# EAGLE board GPS_Shield_Panel_v20 (EAGLE 7.5.0), part 1 of 3
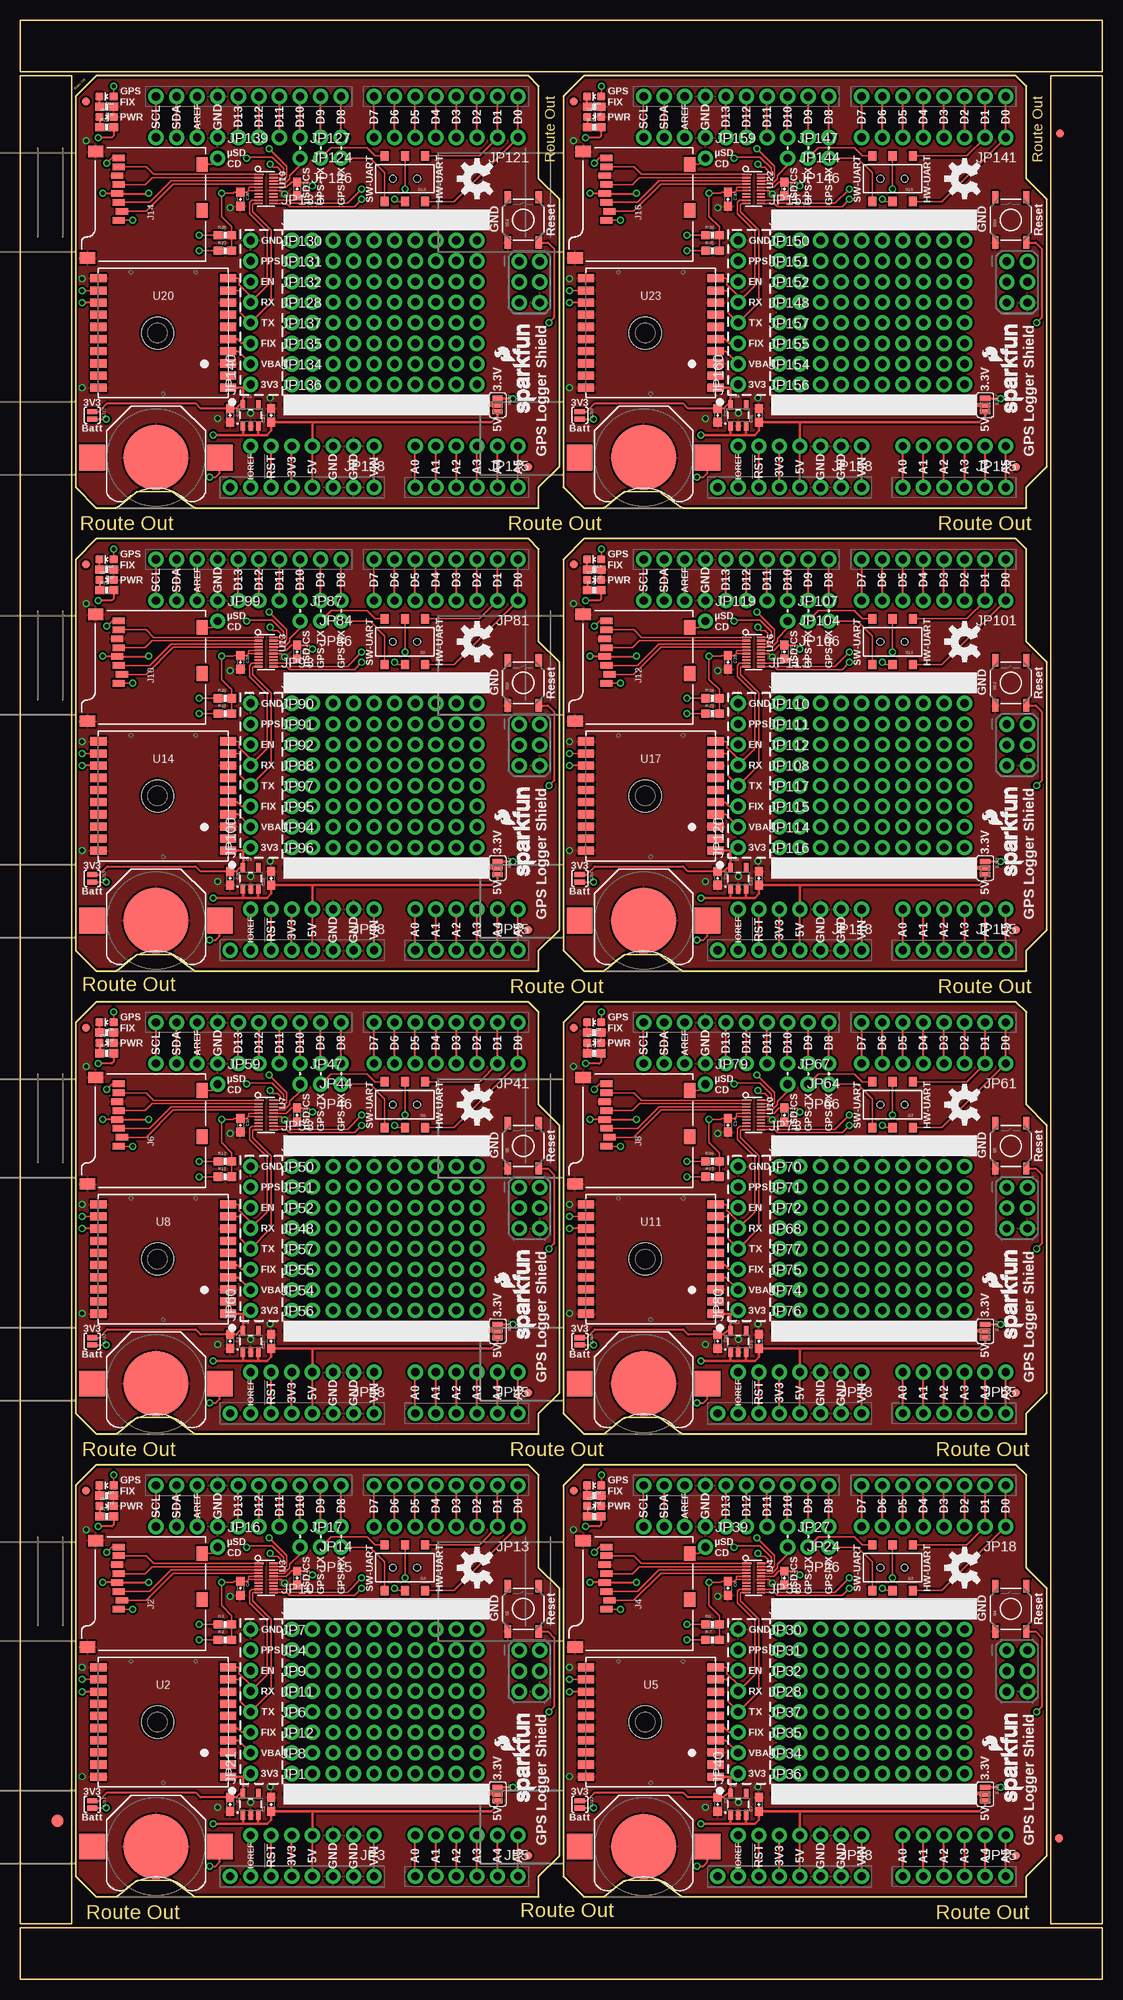
[diagram p0: board, top side]
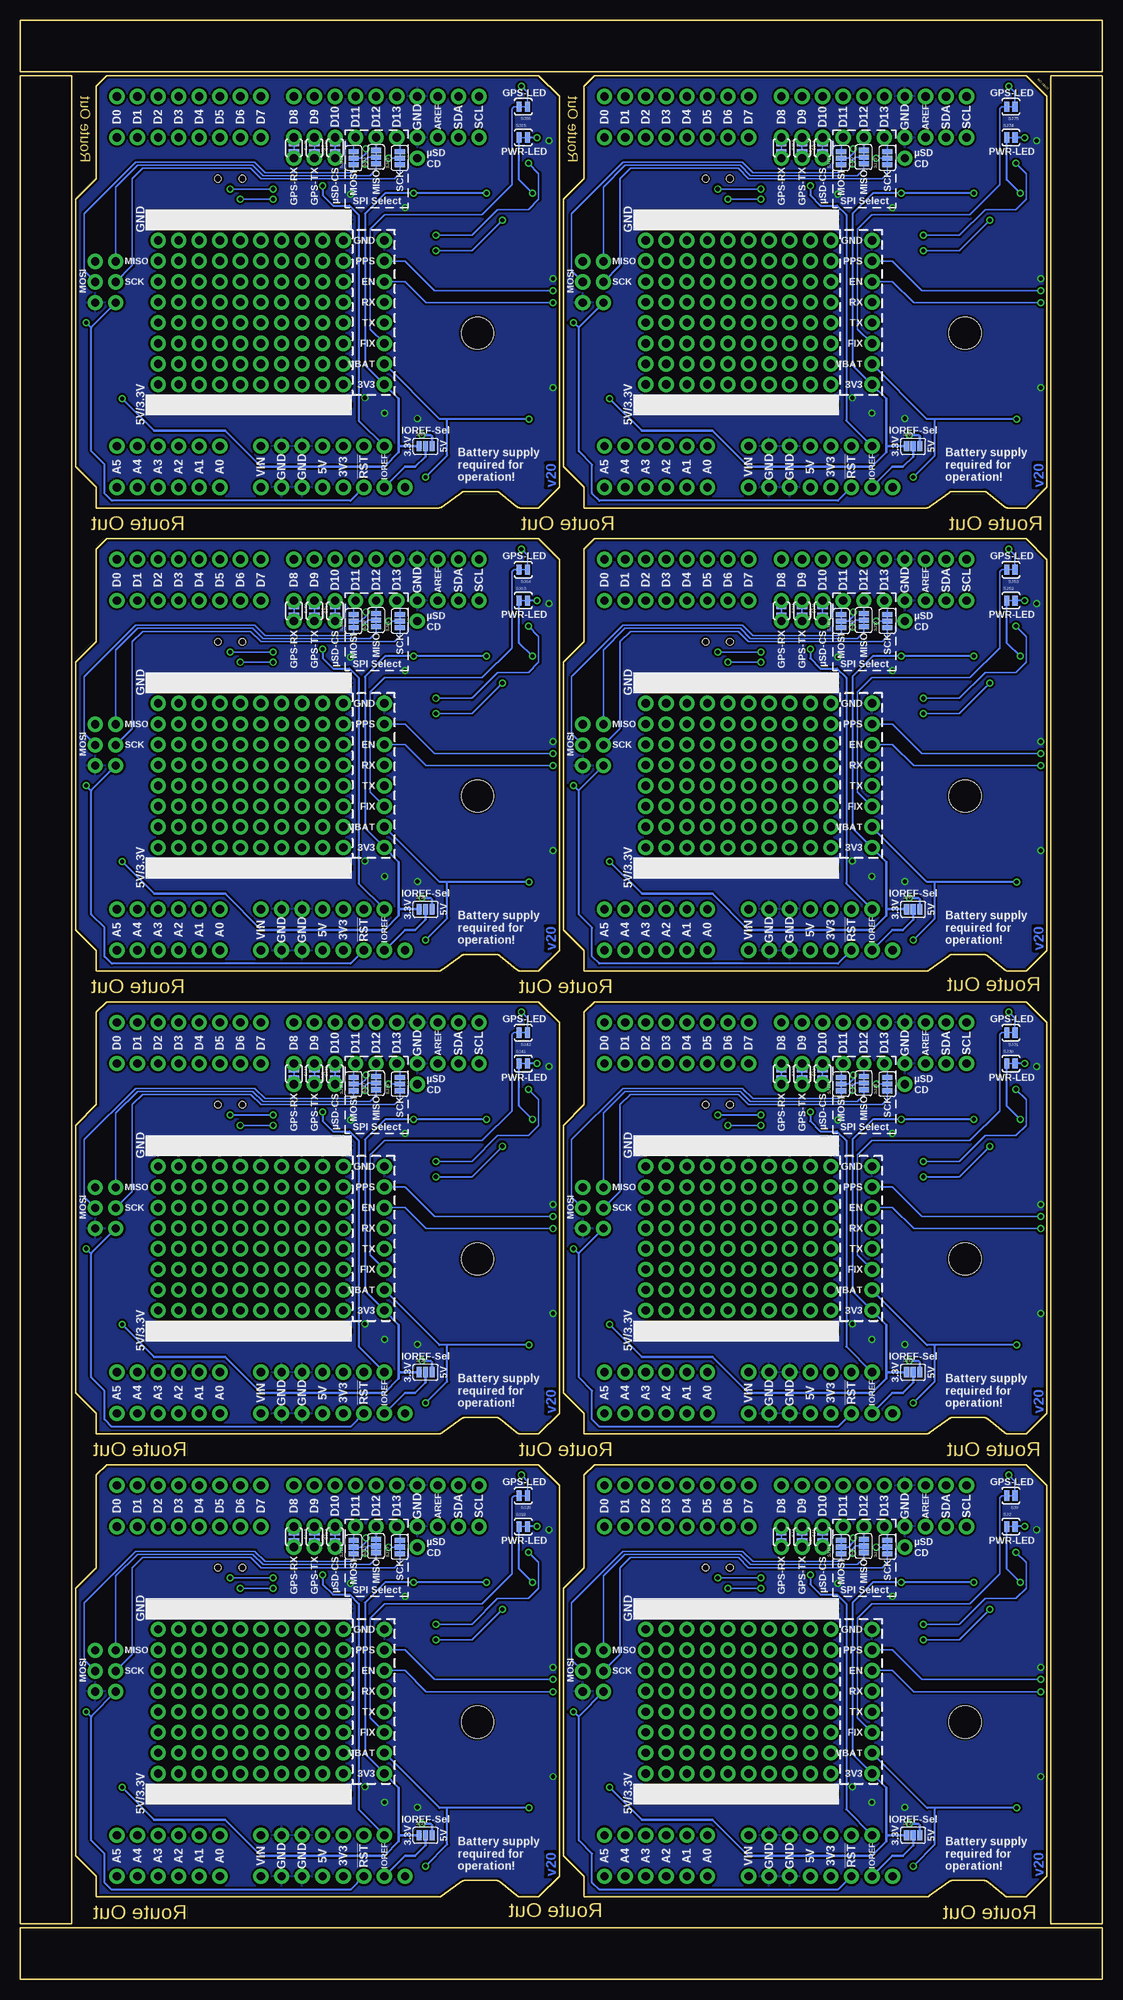
[diagram p1: board, bottom side, seen from below]

Size 133.6 x 241.81 mm. Coordinates in mm from the lower left corner, seen from the top.
Outline: 6.35,82.55 6.35,6.86 0,6.86 0,33.02
Outline: 0,30.48 0,234.95 6.35,234.95 6.35,80.01
Outline: 79.25,0 0,0 0,6.35 29.72,6.35
Outline: 27.18,6.35 133.6,6.35 133.6,0 76.71,0
Outline: 127.25,162.56 127.25,234.95 133.6,234.95 133.6,212.09
Outline: 133.6,214.63 133.6,6.86 127.25,6.86 127.25,165.1
Outline: 54.36,241.81 133.6,241.81 133.6,235.46 103.89,235.46
Outline: 106.43,235.46 0,235.46 0,241.81 56.9,241.81
Outline: 6.86,60.96 9.4,63.5 62.74,63.5 64.01,62.23 64.01,50.8 66.55,48.26 66.55,15.24 64.01,12.7 64.01,10.16 21.73,10.16 arc-45 21.28,10.35 18.98,12.01 arc45 18.53,12.19 14.61,12.19 arc45 14.16,12.01 12.12,10.35 arc-45 11.68,10.16 9.4,10.16 6.86,12.7 6.86,60.96
Outline: 67.06,60.96 69.6,63.5 122.94,63.5 124.21,62.23 124.21,50.8 126.75,48.26 126.75,15.24 124.21,12.7 124.21,10.16 81.92,10.16 arc-45 81.47,10.35 79.18,12.01 arc45 78.73,12.19 74.81,12.19 arc45 74.36,12.01 72.32,10.35 arc-45 71.87,10.16 69.6,10.16 67.06,12.7 67.06,60.96
Outline: 6.86,118.11 9.4,120.65 62.74,120.65 64.01,119.38 64.01,107.95 66.55,105.41 66.55,72.39 64.01,69.85 64.01,67.31 21.73,67.31 arc-45 21.28,67.5 18.98,69.16 arc45 18.53,69.34 14.61,69.34 arc45 14.16,69.16 12.12,67.5 arc-45 11.68,67.31 9.4,67.31 6.86,69.85 6.86,118.11
Outline: 67.06,118.11 69.6,120.65 122.94,120.65 124.21,119.38 124.21,107.95 126.75,105.41 126.75,72.39 124.21,69.85 124.21,67.31 81.92,67.31 arc-45 81.47,67.5 79.18,69.16 arc45 78.73,69.34 74.81,69.34 arc45 74.36,69.16 72.32,67.5 arc-45 71.87,67.31 69.6,67.31 67.06,69.85 67.06,118.11
Outline: 6.86,175.26 9.4,177.8 62.74,177.8 64.01,176.53 64.01,165.1 66.55,162.56 66.55,129.54 64.01,127 64.01,124.46 21.73,124.46 arc-45 21.28,124.65 18.98,126.31 arc45 18.53,126.49 14.61,126.49 arc45 14.16,126.31 12.12,124.65 arc-45 11.68,124.46 9.4,124.46 6.86,127 6.86,175.26
Outline: 67.06,175.26 69.6,177.8 122.94,177.8 124.21,176.53 124.21,165.1 126.75,162.56 126.75,129.54 124.21,127 124.21,124.46 81.92,124.46 arc-45 81.47,124.65 79.18,126.31 arc45 78.73,126.49 74.81,126.49 arc45 74.36,126.31 72.32,124.65 arc-45 71.87,124.46 69.6,124.46 67.06,127 67.06,175.26
Outline: 6.86,232.41 9.4,234.95 62.74,234.95 64.01,233.68 64.01,222.25 66.55,219.71 66.55,186.69 64.01,184.15 64.01,181.61 21.73,181.61 arc-45 21.28,181.8 18.98,183.46 arc45 18.53,183.64 14.61,183.64 arc45 14.16,183.46 12.12,181.8 arc-45 11.68,181.61 9.4,181.61 6.86,184.15 6.86,232.41
Outline: 67.06,232.41 69.6,234.95 122.94,234.95 124.21,233.68 124.21,222.25 126.75,219.71 126.75,186.69 124.21,184.15 124.21,181.61 81.92,181.61 arc-45 81.47,181.8 79.18,183.46 arc45 78.73,183.64 74.81,183.64 arc45 74.36,183.46 72.32,181.8 arc-45 71.87,181.61 69.6,181.61 67.06,184.15 67.06,232.41
Copper layers (1*16): Top 0.035mm / dielectric 1.5mm / Bottom 0.035mm
Design rules "SparkFun-2-layer-TIGHT": minimum track width 7mil, minimum drill 15mil, track to track 7mil, track to pad 7mil, pad to pad 7mil, via to via 7mil, smd to smd 7mil, copper to edge 7mil, drill to drill 7mil, minimum pad ring 7mil, minimum via ring 7mil, stop-mask expansion 4mil, vias tented up to drill 20mil, thermal gap 10mil

## Footprints (pad centres in the part's own frame; a part is rotated, then mirrored left to right if it is on the bottom)
BATTCON_12MM = smd 8 x 8: GND 0,0 | smd 3.175 x 3.175: PWR@1 -7.874,0; PWR@2 7.874,0
0603-CAP = smd 1.1 x 1: 1 -0.85,0; 2 0.85,0
LED-0603 = smd 1 x 1: A 0,-0.877; C 0,0.877
FIDUCIAL-1.5X3 = smd 1.5 x 1.5: 1 0,0
FIDUCIAL-1X2 = smd 1 x 1: 1 0,0
UNO_R3_SHIELD_ICSP_NOLABELS = drill 1.016 pad 1.88: 3.3V 50.8,26.67; 5V 50.8,29.21; 5V_ICSP 22.91,57.29; A0 50.8,41.91; A1 50.8,44.45; A2 50.8,46.99; A3 50.8,49.53; A4 50.8,52.07; A5 50.8,54.61; AREF 2.54,14.986; D2 2.54,49.53; D3 2.54,46.99; D4 2.54,44.45; D5 2.54,41.91; D6 2.54,39.37; D7 2.54,36.83; D8 2.54,32.766; D9 2.54,30.226; D10 2.54,27.686; D11 2.54,25.146; D12 2.54,22.606; D13 2.54,20.066; GND@0 50.8,31.75; GND@1 50.8,34.29; GND@2 2.54,17.526; GND_ICSP 27.99,57.29; IOREF 50.8,21.59; MISO 22.91,54.75; MOSI 25.45,57.29; NC 50.8,19.05; RES 50.8,24.13; RST_ICSP 27.99,54.75; RX 2.54,54.61; SCK 25.45,54.75; SCL 2.54,9.906; SDA 2.54,12.446; TX 2.54,52.07; VIN 50.8,36.83
MICRO-SD-SOCKET-PP = smd 1.8 x 1.4: CD1 -2.05,0.4; CD2 -7.75,0.4 | smd 0.8 x 1.5: CS -7.84,10.3; DI -6.74,10.7; DO -2.34,10.7; GND -3.44,10.9; RSV1 -8.94,10.7; RSV2 -1.24,10.7; SCLK -4.54,10.7; VCC -5.64,10.9 | smd 1.4 x 1.9: GND1 -13.6,14.55; GND3 -0.45,13.55
1X10_NO_SILK = drill 1.016 pad 1.88: 1 0,0; 2 2.54,0; 3 5.08,0; 4 7.62,0; 5 10.16,0; 6 12.7,0; 7 15.24,0; 8 17.78,0; 9 20.32,0; 10 22.86,0
1X07_NO_SILK = drill 1.016 pad 1.88: 1 0,0; 2 2.54,0; 3 5.08,0; 4 7.62,0; 5 10.16,0; 6 12.7,0; 7 15.24,0
1X06_NO_SILK = drill 1.016 pad 1.88: 1 0,0; 2 2.54,0; 3 5.08,0; 4 7.62,0; 5 10.16,0; 6 12.7,0
1X08_NO_SILK = drill 1.016 pad 1.88: 1 0,0; 2 2.54,0; 3 5.08,0; 4 7.62,0; 5 10.16,0; 6 12.7,0; 7 15.24,0; 8 17.78,0
1X02_NO_SILK = drill 1.016 pad 1.88: 1 0,0; 2 2.54,0
1X01_NO_SILK = drill 1.016 pad 1.88: 1 0,0
0603-RES = smd 1.1 x 1: 1 -0.85,0; 2 0.85,0
TACTILE-SWITCH-SMD = smd 1.524 x 0.762: 1 -2.794,1.905; 2 2.794,1.905; 3 -2.794,-1.905; 4 2.794,-1.905
AYZ0202 = smd 1 x 1.15: 1 -2.5,2.825; 2 0,2.825; 3 2.5,2.825; 4 -2.5,-2.825; 5 0,-2.825; 6 2.5,-2.825 | hole 0.85: 1.5,0; -1.5,0
PAD-JUMPER-3-2OF3_NC_BY_PASTE_YES_SILK_FULL_BOX = smd 0.635 x 1.27: 1 -0.813,0; 2 0,0; 3 0.813,0
PAD-JUMPER-2-NC_BY_TRACE_YES_SILK = smd 0.635 x 1.27: 1 -0.508,0; 2 0.508,0
PAD-JUMPER-3-NO_YES_SILK = smd 0.635 x 1.27: 1 -0.813,0; 2 0,0; 3 0.813,0
PAD-JUMPER-3-3OF3_NC_BY_TRACE_YES_SILK_FULL_BOX = smd 0.635 x 1.27: 1 -0.813,0; 2 0,0; 3 0.813,0
PAD-JUMPER-2-NO_YES_SILK = smd 0.635 x 1.27: 1 -0.45,0; 2 0.45,0
SOT23-5 = smd 0.55 x 1.2: 1 -0.95,-1.3; 2 0,-1.3; 3 0.95,-1.3; 4 0.95,1.3; 5 -0.95,1.3
GP3906-TLP = smd 2 x 1: 1 8,-6.75; 2 8,-5.25; 3 8,-3.75; 4 8,-2.25; 5 8,-0.75; 6 8,0.75; 7 8,2.25; 8 8,3.75; 9 8,5.25; 10 8,6.75; 11 -8,6.75; 12 -8,5.25; 13 -8,3.75; 14 -8,2.25; 15 -8,0.75; 16 -8,-0.75; 17 -8,-2.25; 18 -8,-3.75; 19 -8,-5.25; 20 -8,-6.75 | hole 4: -0.7,0
UFDFN-20 = smd 0.2 x 1.1: 1 -1.8,-0.85 | smd 0.2 x 1: 2 -1.4,-0.9; 3 -1,-0.9; 4 -0.6,-0.9; 5 -0.2,-0.9; 6 0.2,-0.9; 7 0.6,-0.9; 8 1,-0.9; 9 1.4,-0.9; 10 1.8,-0.9; 11 1.8,0.9; 12 1.4,0.9; 13 1,0.9; 14 0.6,0.9; 15 0.2,0.9; 16 -0.2,0.9; 17 -0.6,0.9; 18 -1,0.9; 19 -1.4,0.9; 20 -1.8,0.9

## Placement (x,y rotation side)
BAT1  12mm  [BATTCON_12MM]  16.76,16.38 180 top
BAT2  12mm  [BATTCON_12MM]  76.96,16.38 180 top
BAT3  12mm  [BATTCON_12MM]  16.76,73.53 180 top
BAT4  12mm  [BATTCON_12MM]  76.96,73.53 180 top
BAT5  12mm  [BATTCON_12MM]  16.76,130.68 180 top
BAT6  12mm  [BATTCON_12MM]  76.96,130.68 180 top
BAT7  12mm  [BATTCON_12MM]  16.76,187.83 180 top
BAT8  12mm  [BATTCON_12MM]  76.96,187.83 180 top
C1  1.0uF  [0603-CAP]  30.99,21.59 90 top
C2  1.0uF  [0603-CAP]  25.91,21.59 270 top
C3  0.1uF  [0603-CAP]  34.16,49.53 270 top
C4  0.1uF  [0603-CAP]  27.18,48.26 270 top
C5  0.1uF  [0603-CAP]  94.36,49.53 270 top
C6  0.1uF  [0603-CAP]  87.38,48.26 270 top
C7  1.0uF  [0603-CAP]  91.19,21.59 90 top
C8  1.0uF  [0603-CAP]  86.11,21.59 270 top
C9  0.1uF  [0603-CAP]  34.16,106.68 270 top
C10  0.1uF  [0603-CAP]  27.18,105.41 270 top
C11  1.0uF  [0603-CAP]  30.99,78.74 90 top
C12  1.0uF  [0603-CAP]  25.91,78.74 270 top
C13  0.1uF  [0603-CAP]  94.36,106.68 270 top
C14  0.1uF  [0603-CAP]  87.38,105.41 270 top
C15  1.0uF  [0603-CAP]  91.19,78.74 90 top
C16  1.0uF  [0603-CAP]  86.11,78.74 270 top
C17  0.1uF  [0603-CAP]  34.16,163.83 270 top
C18  0.1uF  [0603-CAP]  27.18,162.56 270 top
C19  1.0uF  [0603-CAP]  30.99,135.89 90 top
C20  1.0uF  [0603-CAP]  25.91,135.89 270 top
C21  0.1uF  [0603-CAP]  94.36,163.83 270 top
C22  0.1uF  [0603-CAP]  87.38,162.56 270 top
C23  1.0uF  [0603-CAP]  91.19,135.89 90 top
C24  1.0uF  [0603-CAP]  86.11,135.89 270 top
C25  0.1uF  [0603-CAP]  34.16,220.98 270 top
C26  0.1uF  [0603-CAP]  27.18,219.71 270 top
C27  1.0uF  [0603-CAP]  30.99,193.04 90 top
C28  1.0uF  [0603-CAP]  25.91,193.04 270 top
C29  0.1uF  [0603-CAP]  94.36,220.98 270 top
C30  0.1uF  [0603-CAP]  87.38,219.71 270 top
C31  1.0uF  [0603-CAP]  91.19,193.04 90 top
C32  1.0uF  [0603-CAP]  86.11,193.04 270 top
D1  RED  [LED-0603]  10.67,58.42 270 top
D2  BLUE  [LED-0603]  10.67,60.96 90 top
D3  RED  [LED-0603]  70.87,58.42 270 top
D4  BLUE  [LED-0603]  70.87,60.96 90 top
D5  RED  [LED-0603]  10.67,115.57 270 top
D6  BLUE  [LED-0603]  10.67,118.11 90 top
D7  RED  [LED-0603]  70.87,115.57 270 top
D8  BLUE  [LED-0603]  70.87,118.11 90 top
D9  RED  [LED-0603]  10.67,172.72 270 top
D10  BLUE  [LED-0603]  10.67,175.26 90 top
D11  RED  [LED-0603]  70.87,172.72 270 top
D12  BLUE  [LED-0603]  70.87,175.26 90 top
D13  RED  [LED-0603]  10.67,229.87 270 top
D14  BLUE  [LED-0603]  10.67,232.41 90 top
D15  RED  [LED-0603]  70.87,229.87 270 top
D16  BLUE  [LED-0603]  70.87,232.41 90 top
E$1  [FIDUCIAL-1.5X3]  4.57,19.56 0 top
E$4  [FIDUCIAL-1X2]  128.27,17.4 90 top
E$5  [FIDUCIAL-1X2]  128.4,227.84 180 top
J1  ARDUINO_R3_SHIELD  [UNO_R3_SHIELD_ICSP_NOLABELS]  6.86,63.5 270 top
J2  USD_CONNECTOR  [MICRO-SD-SOCKET-PP]  22.86,54.61 90 top
J3  ARDUINO_R3_SHIELD  [UNO_R3_SHIELD_ICSP_NOLABELS]  67.06,63.5 270 top
J4  USD_CONNECTOR  [MICRO-SD-SOCKET-PP]  83.06,54.61 90 top
J5  ARDUINO_R3_SHIELD  [UNO_R3_SHIELD_ICSP_NOLABELS]  6.86,120.65 270 top
J6  USD_CONNECTOR  [MICRO-SD-SOCKET-PP]  22.86,111.76 90 top
J7  ARDUINO_R3_SHIELD  [UNO_R3_SHIELD_ICSP_NOLABELS]  67.06,120.65 270 top
J8  USD_CONNECTOR  [MICRO-SD-SOCKET-PP]  83.06,111.76 90 top
J9  ARDUINO_R3_SHIELD  [UNO_R3_SHIELD_ICSP_NOLABELS]  6.86,177.8 270 top
J10  USD_CONNECTOR  [MICRO-SD-SOCKET-PP]  22.86,168.91 90 top
J11  ARDUINO_R3_SHIELD  [UNO_R3_SHIELD_ICSP_NOLABELS]  67.06,177.8 270 top
J12  USD_CONNECTOR  [MICRO-SD-SOCKET-PP]  83.06,168.91 90 top
J13  ARDUINO_R3_SHIELD  [UNO_R3_SHIELD_ICSP_NOLABELS]  6.86,234.95 270 top
J14  USD_CONNECTOR  [MICRO-SD-SOCKET-PP]  22.86,226.06 90 top
J15  ARDUINO_R3_SHIELD  [UNO_R3_SHIELD_ICSP_NOLABELS]  67.06,234.95 270 top
J16  USD_CONNECTOR  [MICRO-SD-SOCKET-PP]  83.06,226.06 90 top
JP1  [1X10_NO_SILK]  33.53,22.86 0 top
JP2  [1X10_NO_SILK]  33.53,43.18 0 top
JP3  [1X07_NO_SILK]  43.69,17.78 180 top
JP4  [1X10_NO_SILK]  33.53,38.1 0 top
JP5  [1X06_NO_SILK]  61.47,17.78 180 top
JP6  [1X10_NO_SILK]  33.53,30.48 0 top
JP7  [1X10_NO_SILK]  33.53,40.64 0 top
JP8  [1X10_NO_SILK]  33.53,25.4 0 top
JP9  [1X10_NO_SILK]  33.53,35.56 0 top
JP10  [1X10_NO_SILK]  33.53,45.72 0 top
JP11  [1X10_NO_SILK]  33.53,33.02 0 top
JP12  [1X10_NO_SILK]  33.53,27.94 0 top
JP13  [1X08_NO_SILK]  61.47,55.88 180 top
JP14  [1X10_NO_SILK]  39.62,55.88 180 top
JP15  [1X02_NO_SILK]  39.62,53.34 180 top
JP16  [1X01_NO_SILK]  24.38,53.34 0 top
JP17  [1X01_NO_SILK]  34.54,53.34 0 top
JP18  [1X08_NO_SILK]  121.67,55.88 180 top
JP19  FIDUCIAL1X2  [FIDUCIAL-1X2]  8.13,60.33 270 top
JP20  FIDUCIAL1X2  [FIDUCIAL-1X2]  62.74,15.24 270 top
JP21  [1X08_NO_SILK]  28.45,25.4 90 top
JP22  FIDUCIAL1X2  [FIDUCIAL-1X2]  122.94,15.24 270 top
JP23  FIDUCIAL1X2  [FIDUCIAL-1X2]  68.33,60.33 270 top
JP24  [1X10_NO_SILK]  99.82,55.88 180 top
JP25  [1X06_NO_SILK]  121.67,17.78 180 top
JP26  [1X02_NO_SILK]  99.82,53.34 180 top
JP27  [1X01_NO_SILK]  94.74,53.34 0 top
JP28  [1X10_NO_SILK]  93.73,33.02 0 top
JP29  [1X10_NO_SILK]  93.73,43.18 0 top
JP30  [1X10_NO_SILK]  93.73,40.64 0 top
JP31  [1X10_NO_SILK]  93.73,38.1 0 top
JP32  [1X10_NO_SILK]  93.73,35.56 0 top
JP33  [1X10_NO_SILK]  93.73,45.72 0 top
JP34  [1X10_NO_SILK]  93.73,25.4 0 top
JP35  [1X10_NO_SILK]  93.73,27.94 0 top
JP36  [1X10_NO_SILK]  93.73,22.86 0 top
JP37  [1X10_NO_SILK]  93.73,30.48 0 top
JP38  [1X07_NO_SILK]  103.89,17.78 180 top
JP39  [1X01_NO_SILK]  84.58,53.34 0 top
JP40  [1X08_NO_SILK]  88.65,25.4 90 top
JP41  [1X08_NO_SILK]  61.47,113.03 180 top
JP42  FIDUCIAL1X2  [FIDUCIAL-1X2]  62.74,72.39 270 top
JP43  FIDUCIAL1X2  [FIDUCIAL-1X2]  8.13,117.47 270 top
JP44  [1X10_NO_SILK]  39.62,113.03 180 top
JP45  [1X06_NO_SILK]  61.47,74.93 180 top
JP46  [1X02_NO_SILK]  39.62,110.49 180 top
JP47  [1X01_NO_SILK]  34.54,110.49 0 top
JP48  [1X10_NO_SILK]  33.53,90.17 0 top
JP49  [1X10_NO_SILK]  33.53,100.33 0 top
JP50  [1X10_NO_SILK]  33.53,97.79 0 top
JP51  [1X10_NO_SILK]  33.53,95.25 0 top
JP52  [1X10_NO_SILK]  33.53,92.71 0 top
JP53  [1X10_NO_SILK]  33.53,102.87 0 top
JP54  [1X10_NO_SILK]  33.53,82.55 0 top
JP55  [1X10_NO_SILK]  33.53,85.09 0 top
JP56  [1X10_NO_SILK]  33.53,80.01 0 top
JP57  [1X10_NO_SILK]  33.53,87.63 0 top
JP58  [1X07_NO_SILK]  43.69,74.93 180 top
JP59  [1X01_NO_SILK]  24.38,110.49 0 top
JP60  [1X08_NO_SILK]  28.45,82.55 90 top
JP61  [1X08_NO_SILK]  121.67,113.03 180 top
JP62  FIDUCIAL1X2  [FIDUCIAL-1X2]  122.94,72.39 270 top
JP63  FIDUCIAL1X2  [FIDUCIAL-1X2]  68.33,117.47 270 top
JP64  [1X10_NO_SILK]  99.82,113.03 180 top
JP65  [1X06_NO_SILK]  121.67,74.93 180 top
JP66  [1X02_NO_SILK]  99.82,110.49 180 top
JP67  [1X01_NO_SILK]  94.74,110.49 0 top
JP68  [1X10_NO_SILK]  93.73,90.17 0 top
JP69  [1X10_NO_SILK]  93.73,100.33 0 top
JP70  [1X10_NO_SILK]  93.73,97.79 0 top
JP71  [1X10_NO_SILK]  93.73,95.25 0 top
JP72  [1X10_NO_SILK]  93.73,92.71 0 top
JP73  [1X10_NO_SILK]  93.73,102.87 0 top
JP74  [1X10_NO_SILK]  93.73,82.55 0 top
JP75  [1X10_NO_SILK]  93.73,85.09 0 top
JP76  [1X10_NO_SILK]  93.73,80.01 0 top
JP77  [1X10_NO_SILK]  93.73,87.63 0 top
JP78  [1X07_NO_SILK]  103.89,74.93 180 top
JP79  [1X01_NO_SILK]  84.58,110.49 0 top
JP80  [1X08_NO_SILK]  88.65,82.55 90 top
JP81  [1X08_NO_SILK]  61.47,170.18 180 top
JP82  FIDUCIAL1X2  [FIDUCIAL-1X2]  62.74,129.54 270 top
JP83  FIDUCIAL1X2  [FIDUCIAL-1X2]  8.13,174.62 270 top
JP84  [1X10_NO_SILK]  39.62,170.18 180 top
JP85  [1X06_NO_SILK]  61.47,132.08 180 top
JP86  [1X02_NO_SILK]  39.62,167.64 180 top
JP87  [1X01_NO_SILK]  34.54,167.64 0 top
JP88  [1X10_NO_SILK]  33.53,147.32 0 top
JP89  [1X10_NO_SILK]  33.53,157.48 0 top
JP90  [1X10_NO_SILK]  33.53,154.94 0 top
JP91  [1X10_NO_SILK]  33.53,152.4 0 top
JP92  [1X10_NO_SILK]  33.53,149.86 0 top
JP93  [1X10_NO_SILK]  33.53,160.02 0 top
JP94  [1X10_NO_SILK]  33.53,139.7 0 top
JP95  [1X10_NO_SILK]  33.53,142.24 0 top
JP96  [1X10_NO_SILK]  33.53,137.16 0 top
JP97  [1X10_NO_SILK]  33.53,144.78 0 top
JP98  [1X07_NO_SILK]  43.69,132.08 180 top
JP99  [1X01_NO_SILK]  24.38,167.64 0 top
JP100  [1X08_NO_SILK]  28.45,139.7 90 top
JP101  [1X08_NO_SILK]  121.67,170.18 180 top
JP102  FIDUCIAL1X2  [FIDUCIAL-1X2]  122.94,129.54 270 top
JP103  FIDUCIAL1X2  [FIDUCIAL-1X2]  68.33,174.62 270 top
JP104  [1X10_NO_SILK]  99.82,170.18 180 top
JP105  [1X06_NO_SILK]  121.67,132.08 180 top
JP106  [1X02_NO_SILK]  99.82,167.64 180 top
JP107  [1X01_NO_SILK]  94.74,167.64 0 top
JP108  [1X10_NO_SILK]  93.73,147.32 0 top
JP109  [1X10_NO_SILK]  93.73,157.48 0 top
JP110  [1X10_NO_SILK]  93.73,154.94 0 top
JP111  [1X10_NO_SILK]  93.73,152.4 0 top
JP112  [1X10_NO_SILK]  93.73,149.86 0 top
JP113  [1X10_NO_SILK]  93.73,160.02 0 top
JP114  [1X10_NO_SILK]  93.73,139.7 0 top
JP115  [1X10_NO_SILK]  93.73,142.24 0 top
JP116  [1X10_NO_SILK]  93.73,137.16 0 top
JP117  [1X10_NO_SILK]  93.73,144.78 0 top
JP118  [1X07_NO_SILK]  103.89,132.08 180 top
JP119  [1X01_NO_SILK]  84.58,167.64 0 top
JP120  [1X08_NO_SILK]  88.65,139.7 90 top
JP121  [1X08_NO_SILK]  61.47,227.33 180 top
JP122  FIDUCIAL1X2  [FIDUCIAL-1X2]  62.74,186.69 270 top
JP123  FIDUCIAL1X2  [FIDUCIAL-1X2]  8.13,231.78 270 top
JP124  [1X10_NO_SILK]  39.62,227.33 180 top
JP125  [1X06_NO_SILK]  61.47,189.23 180 top
JP126  [1X02_NO_SILK]  39.62,224.79 180 top
JP127  [1X01_NO_SILK]  34.54,224.79 0 top
JP128  [1X10_NO_SILK]  33.53,204.47 0 top
JP129  [1X10_NO_SILK]  33.53,214.63 0 top
JP130  [1X10_NO_SILK]  33.53,212.09 0 top
JP131  [1X10_NO_SILK]  33.53,209.55 0 top
JP132  [1X10_NO_SILK]  33.53,207.01 0 top
JP133  [1X10_NO_SILK]  33.53,217.17 0 top
JP134  [1X10_NO_SILK]  33.53,196.85 0 top
JP135  [1X10_NO_SILK]  33.53,199.39 0 top
JP136  [1X10_NO_SILK]  33.53,194.31 0 top
JP137  [1X10_NO_SILK]  33.53,201.93 0 top
JP138  [1X07_NO_SILK]  43.69,189.23 180 top
JP139  [1X01_NO_SILK]  24.38,224.79 0 top
JP140  [1X08_NO_SILK]  28.45,196.85 90 top
JP141  [1X08_NO_SILK]  121.67,227.33 180 top
JP142  FIDUCIAL1X2  [FIDUCIAL-1X2]  122.94,186.69 270 top
JP143  FIDUCIAL1X2  [FIDUCIAL-1X2]  68.33,231.78 270 top
JP144  [1X10_NO_SILK]  99.82,227.33 180 top
JP145  [1X06_NO_SILK]  121.67,189.23 180 top
JP146  [1X02_NO_SILK]  99.82,224.79 180 top
JP147  [1X01_NO_SILK]  94.74,224.79 0 top
JP148  [1X10_NO_SILK]  93.73,204.47 0 top
JP149  [1X10_NO_SILK]  93.73,214.63 0 top
JP150  [1X10_NO_SILK]  93.73,212.09 0 top
JP151  [1X10_NO_SILK]  93.73,209.55 0 top
JP152  [1X10_NO_SILK]  93.73,207.01 0 top
JP153  [1X10_NO_SILK]  93.73,217.17 0 top
JP154  [1X10_NO_SILK]  93.73,196.85 0 top
JP155  [1X10_NO_SILK]  93.73,199.39 0 top
JP156  [1X10_NO_SILK]  93.73,194.31 0 top
JP157  [1X10_NO_SILK]  93.73,201.93 0 top
JP158  [1X07_NO_SILK]  103.89,189.23 180 top
JP159  [1X01_NO_SILK]  84.58,224.79 0 top
JP160  [1X08_NO_SILK]  88.65,196.85 90 top
LOGO1  OSHW-LOGOM  [OSHW-LOGO-M]  56.39,50.8 90 top
LOGO2  SFE_LOGO_NAME_FLAME.1_INCH  [SFE_LOGO_NAME_FLAME_.1]  63.75,21.46 90 top
LOGO3  SFE_LOGO_NAME_FLAME.1_INCH  [SFE_LOGO_NAME_FLAME_.1]  123.95,21.46 90 top
LOGO4  OSHW-LOGOM  [OSHW-LOGO-M]  116.59,50.8 90 top
LOGO5  SFE_LOGO_NAME_FLAME.1_INCH  [SFE_LOGO_NAME_FLAME_.1]  63.75,78.61 90 top
LOGO6  OSHW-LOGOM  [OSHW-LOGO-M]  56.39,107.95 90 top
LOGO7  SFE_LOGO_NAME_FLAME.1_INCH  [SFE_LOGO_NAME_FLAME_.1]  123.95,78.61 90 top
LOGO8  OSHW-LOGOM  [OSHW-LOGO-M]  116.59,107.95 90 top
LOGO9  SFE_LOGO_NAME_FLAME.1_INCH  [SFE_LOGO_NAME_FLAME_.1]  63.75,135.76 90 top
LOGO10  OSHW-LOGOM  [OSHW-LOGO-M]  56.39,165.1 90 top
LOGO11  SFE_LOGO_NAME_FLAME.1_INCH  [SFE_LOGO_NAME_FLAME_.1]  123.95,135.76 90 top
LOGO12  OSHW-LOGOM  [OSHW-LOGO-M]  116.59,165.1 90 top
LOGO13  SFE_LOGO_NAME_FLAME.1_INCH  [SFE_LOGO_NAME_FLAME_.1]  63.75,192.91 90 top
LOGO14  OSHW-LOGOM  [OSHW-LOGO-M]  56.39,222.25 90 top
LOGO15  SFE_LOGO_NAME_FLAME.1_INCH  [SFE_LOGO_NAME_FLAME_.1]  123.95,192.91 90 top
LOGO16  OSHW-LOGOM  [OSHW-LOGO-M]  116.59,222.25 90 top
R1  1K  [0603-RES]  10.67,57.15 0 top
R2  100k  [0603-RES]  25.27,41.91 0 top
R3  100k  [0603-RES]  25.27,43.81 0 top
R4  330  [0603-RES]  10.67,59.69 180 top
R5  1K  [0603-RES]  70.87,57.15 0 top
R6  330  [0603-RES]  70.87,59.69 180 top
R7  100k  [0603-RES]  85.47,41.91 0 top
R8  100k  [0603-RES]  85.47,43.81 0 top
R9  1K  [0603-RES]  10.67,114.3 0 top
R10  330  [0603-RES]  10.67,116.84 180 top
R11  100k  [0603-RES]  25.27,99.06 0 top
R12  100k  [0603-RES]  25.27,100.97 0 top
R13  1K  [0603-RES]  70.87,114.3 0 top
R14  330  [0603-RES]  70.87,116.84 180 top
R15  100k  [0603-RES]  85.47,99.06 0 top
R16  100k  [0603-RES]  85.47,100.97 0 top
R17  1K  [0603-RES]  10.67,171.45 0 top
R18  330  [0603-RES]  10.67,173.99 180 top
R19  100k  [0603-RES]  25.27,156.21 0 top
R20  100k  [0603-RES]  25.27,158.12 0 top
R21  1K  [0603-RES]  70.87,171.45 0 top
R22  330  [0603-RES]  70.87,173.99 180 top
R23  100k  [0603-RES]  85.47,156.21 0 top
R24  100k  [0603-RES]  85.47,158.12 0 top
R25  1K  [0603-RES]  10.67,228.6 0 top
R26  330  [0603-RES]  10.67,231.14 180 top
R27  100k  [0603-RES]  25.27,213.36 0 top
R28  100k  [0603-RES]  25.27,215.26 0 top
R29  1K  [0603-RES]  70.87,228.6 0 top
R30  330  [0603-RES]  70.87,231.14 180 top
R31  100k  [0603-RES]  85.47,213.36 0 top
R32  100k  [0603-RES]  85.47,215.26 0 top
S1  Reset  [TACTILE-SWITCH-SMD]  62.1,45.72 90 top
S2  DPDT  [AYZ0202]  47.5,50.8 180 top
S3  DPDT  [AYZ0202]  107.7,50.8 180 top
S4  Reset  [TACTILE-SWITCH-SMD]  122.3,45.72 90 top
S5  DPDT  [AYZ0202]  47.5,107.95 180 top
S6  Reset  [TACTILE-SWITCH-SMD]  62.1,102.87 90 top
S7  DPDT  [AYZ0202]  107.7,107.95 180 top
S8  Reset  [TACTILE-SWITCH-SMD]  122.3,102.87 90 top
S9  DPDT  [AYZ0202]  47.5,165.1 180 top
S10  Reset  [TACTILE-SWITCH-SMD]  62.1,160.02 90 top
S11  DPDT  [AYZ0202]  107.7,165.1 180 top
S12  Reset  [TACTILE-SWITCH-SMD]  122.3,160.02 90 top
S13  DPDT  [AYZ0202]  47.5,222.25 180 top
S14  Reset  [TACTILE-SWITCH-SMD]  62.1,217.17 90 top
S15  DPDT  [AYZ0202]  107.7,222.25 180 top
S16  Reset  [TACTILE-SWITCH-SMD]  122.3,217.17 90 top
SJ1  [PAD-JUMPER-3-2OF3_NC_BY_PASTE_YES_SILK_FULL_BOX]  58.93,22.86 270 top
SJ2  PWR-LED  [PAD-JUMPER-2-NC_BY_TRACE_YES_SILK]  11.3,55.88 0 bottom
SJ3  IOREF  [PAD-JUMPER-3-NO_YES_SILK]  23.37,17.78 0 bottom
SJ4  D_RX  [PAD-JUMPER-2-NC_BY_TRACE_YES_SILK]  39.62,54.61 270 bottom
SJ5  D_TX  [PAD-JUMPER-2-NC_BY_TRACE_YES_SILK]  37.08,54.61 270 bottom
SJ6  CS  [PAD-JUMPER-2-NC_BY_TRACE_YES_SILK]  34.54,54.61 90 bottom
SJ7  uSD-SCK  [PAD-JUMPER-3-3OF3_NC_BY_TRACE_YES_SILK_FULL_BOX]  26.54,53.34 90 bottom
SJ8  uSD-MISO  [PAD-JUMPER-3-3OF3_NC_BY_TRACE_YES_SILK_FULL_BOX]  29.46,53.47 90 bottom
SJ9  GPS-LED  [PAD-JUMPER-2-NC_BY_TRACE_YES_SILK]  11.3,59.69 180 bottom
SJ10  uSD-MOSI  [PAD-JUMPER-3-3OF3_NC_BY_TRACE_YES_SILK_FULL_BOX]  32.26,53.34 90 bottom
SJ11  VBAT-3.3V  [PAD-JUMPER-2-NO_YES_SILK]  8.89,21.59 270 top
SJ12  D_RX  [PAD-JUMPER-2-NC_BY_TRACE_YES_SILK]  99.82,54.61 270 bottom
SJ13  D_TX  [PAD-JUMPER-2-NC_BY_TRACE_YES_SILK]  97.28,54.61 270 bottom
SJ14  IOREF  [PAD-JUMPER-3-NO_YES_SILK]  83.57,17.78 0 bottom
SJ15  uSD-MISO  [PAD-JUMPER-3-3OF3_NC_BY_TRACE_YES_SILK_FULL_BOX]  89.66,53.47 90 bottom
SJ16  uSD-MOSI  [PAD-JUMPER-3-3OF3_NC_BY_TRACE_YES_SILK_FULL_BOX]  92.46,53.34 90 bottom
SJ17  uSD-SCK  [PAD-JUMPER-3-3OF3_NC_BY_TRACE_YES_SILK_FULL_BOX]  86.74,53.34 90 bottom
SJ18  CS  [PAD-JUMPER-2-NC_BY_TRACE_YES_SILK]  94.74,54.61 90 bottom
SJ19  PWR-LED  [PAD-JUMPER-2-NC_BY_TRACE_YES_SILK]  71.5,55.88 0 bottom
SJ20  GPS-LED  [PAD-JUMPER-2-NC_BY_TRACE_YES_SILK]  71.5,59.69 180 bottom
SJ21  [PAD-JUMPER-3-2OF3_NC_BY_PASTE_YES_SILK_FULL_BOX]  119.13,22.86 270 top
SJ22  VBAT-3.3V  [PAD-JUMPER-2-NO_YES_SILK]  69.09,21.59 270 top
SJ23  D_RX  [PAD-JUMPER-2-NC_BY_TRACE_YES_SILK]  39.62,111.76 270 bottom
SJ24  D_TX  [PAD-JUMPER-2-NC_BY_TRACE_YES_SILK]  37.08,111.76 270 bottom
SJ25  IOREF  [PAD-JUMPER-3-NO_YES_SILK]  23.37,74.93 0 bottom
SJ26  uSD-MISO  [PAD-JUMPER-3-3OF3_NC_BY_TRACE_YES_SILK_FULL_BOX]  29.46,110.62 90 bottom
SJ27  uSD-MOSI  [PAD-JUMPER-3-3OF3_NC_BY_TRACE_YES_SILK_FULL_BOX]  32.26,110.49 90 bottom
SJ28  uSD-SCK  [PAD-JUMPER-3-3OF3_NC_BY_TRACE_YES_SILK_FULL_BOX]  26.54,110.49 90 bottom
SJ29  CS  [PAD-JUMPER-2-NC_BY_TRACE_YES_SILK]  34.54,111.76 90 bottom
SJ30  PWR-LED  [PAD-JUMPER-2-NC_BY_TRACE_YES_SILK]  11.3,113.03 0 bottom
SJ31  GPS-LED  [PAD-JUMPER-2-NC_BY_TRACE_YES_SILK]  11.3,116.84 180 bottom
SJ32  [PAD-JUMPER-3-2OF3_NC_BY_PASTE_YES_SILK_FULL_BOX]  58.93,80.01 270 top
SJ33  VBAT-3.3V  [PAD-JUMPER-2-NO_YES_SILK]  8.89,78.74 270 top
SJ34  D_RX  [PAD-JUMPER-2-NC_BY_TRACE_YES_SILK]  99.82,111.76 270 bottom
SJ35  D_TX  [PAD-JUMPER-2-NC_BY_TRACE_YES_SILK]  97.28,111.76 270 bottom
SJ36  IOREF  [PAD-JUMPER-3-NO_YES_SILK]  83.57,74.93 0 bottom
SJ37  uSD-MISO  [PAD-JUMPER-3-3OF3_NC_BY_TRACE_YES_SILK_FULL_BOX]  89.66,110.62 90 bottom
SJ38  uSD-MOSI  [PAD-JUMPER-3-3OF3_NC_BY_TRACE_YES_SILK_FULL_BOX]  92.46,110.49 90 bottom
SJ39  uSD-SCK  [PAD-JUMPER-3-3OF3_NC_BY_TRACE_YES_SILK_FULL_BOX]  86.74,110.49 90 bottom
SJ40  CS  [PAD-JUMPER-2-NC_BY_TRACE_YES_SILK]  94.74,111.76 90 bottom
SJ41  PWR-LED  [PAD-JUMPER-2-NC_BY_TRACE_YES_SILK]  71.5,113.03 0 bottom
SJ42  GPS-LED  [PAD-JUMPER-2-NC_BY_TRACE_YES_SILK]  71.5,116.84 180 bottom
SJ43  [PAD-JUMPER-3-2OF3_NC_BY_PASTE_YES_SILK_FULL_BOX]  119.13,80.01 270 top
SJ44  VBAT-3.3V  [PAD-JUMPER-2-NO_YES_SILK]  69.09,78.74 270 top
SJ45  D_RX  [PAD-JUMPER-2-NC_BY_TRACE_YES_SILK]  39.62,168.91 270 bottom
SJ46  D_TX  [PAD-JUMPER-2-NC_BY_TRACE_YES_SILK]  37.08,168.91 270 bottom
SJ47  IOREF  [PAD-JUMPER-3-NO_YES_SILK]  23.37,132.08 0 bottom
SJ48  uSD-MISO  [PAD-JUMPER-3-3OF3_NC_BY_TRACE_YES_SILK_FULL_BOX]  29.46,167.77 90 bottom
SJ49  uSD-MOSI  [PAD-JUMPER-3-3OF3_NC_BY_TRACE_YES_SILK_FULL_BOX]  32.26,167.64 90 bottom
SJ50  uSD-SCK  [PAD-JUMPER-3-3OF3_NC_BY_TRACE_YES_SILK_FULL_BOX]  26.54,167.64 90 bottom
SJ51  CS  [PAD-JUMPER-2-NC_BY_TRACE_YES_SILK]  34.54,168.91 90 bottom
SJ52  PWR-LED  [PAD-JUMPER-2-NC_BY_TRACE_YES_SILK]  11.3,170.18 0 bottom
SJ53  GPS-LED  [PAD-JUMPER-2-NC_BY_TRACE_YES_SILK]  11.3,173.99 180 bottom
SJ54  [PAD-JUMPER-3-2OF3_NC_BY_PASTE_YES_SILK_FULL_BOX]  58.93,137.16 270 top
SJ55  VBAT-3.3V  [PAD-JUMPER-2-NO_YES_SILK]  8.89,135.89 270 top
SJ56  D_RX  [PAD-JUMPER-2-NC_BY_TRACE_YES_SILK]  99.82,168.91 270 bottom
SJ57  D_TX  [PAD-JUMPER-2-NC_BY_TRACE_YES_SILK]  97.28,168.91 270 bottom
SJ58  IOREF  [PAD-JUMPER-3-NO_YES_SILK]  83.57,132.08 0 bottom
SJ59  uSD-MISO  [PAD-JUMPER-3-3OF3_NC_BY_TRACE_YES_SILK_FULL_BOX]  89.66,167.77 90 bottom
SJ60  uSD-MOSI  [PAD-JUMPER-3-3OF3_NC_BY_TRACE_YES_SILK_FULL_BOX]  92.46,167.64 90 bottom
SJ61  uSD-SCK  [PAD-JUMPER-3-3OF3_NC_BY_TRACE_YES_SILK_FULL_BOX]  86.74,167.64 90 bottom
SJ62  CS  [PAD-JUMPER-2-NC_BY_TRACE_YES_SILK]  94.74,168.91 90 bottom
SJ63  PWR-LED  [PAD-JUMPER-2-NC_BY_TRACE_YES_SILK]  71.5,170.18 0 bottom
SJ64  GPS-LED  [PAD-JUMPER-2-NC_BY_TRACE_YES_SILK]  71.5,173.99 180 bottom
SJ65  [PAD-JUMPER-3-2OF3_NC_BY_PASTE_YES_SILK_FULL_BOX]  119.13,137.16 270 top
SJ66  VBAT-3.3V  [PAD-JUMPER-2-NO_YES_SILK]  69.09,135.89 270 top
SJ67  D_RX  [PAD-JUMPER-2-NC_BY_TRACE_YES_SILK]  39.62,226.06 270 bottom
SJ68  D_TX  [PAD-JUMPER-2-NC_BY_TRACE_YES_SILK]  37.08,226.06 270 bottom
SJ69  IOREF  [PAD-JUMPER-3-NO_YES_SILK]  23.37,189.23 0 bottom
SJ70  uSD-MISO  [PAD-JUMPER-3-3OF3_NC_BY_TRACE_YES_SILK_FULL_BOX]  29.46,224.92 90 bottom
SJ71  uSD-MOSI  [PAD-JUMPER-3-3OF3_NC_BY_TRACE_YES_SILK_FULL_BOX]  32.26,224.79 90 bottom
SJ72  uSD-SCK  [PAD-JUMPER-3-3OF3_NC_BY_TRACE_YES_SILK_FULL_BOX]  26.54,224.79 90 bottom
SJ73  CS  [PAD-JUMPER-2-NC_BY_TRACE_YES_SILK]  34.54,226.06 90 bottom
SJ74  PWR-LED  [PAD-JUMPER-2-NC_BY_TRACE_YES_SILK]  11.3,227.33 0 bottom
SJ75  GPS-LED  [PAD-JUMPER-2-NC_BY_TRACE_YES_SILK]  11.3,231.14 180 bottom
SJ76  [PAD-JUMPER-3-2OF3_NC_BY_PASTE_YES_SILK_FULL_BOX]  58.93,194.31 270 top
SJ77  VBAT-3.3V  [PAD-JUMPER-2-NO_YES_SILK]  8.89,193.04 270 top
SJ78  D_RX  [PAD-JUMPER-2-NC_BY_TRACE_YES_SILK]  99.82,226.06 270 bottom
SJ79  D_TX  [PAD-JUMPER-2-NC_BY_TRACE_YES_SILK]  97.28,226.06 270 bottom
SJ80  IOREF  [PAD-JUMPER-3-NO_YES_SILK]  83.57,189.23 0 bottom
SJ81  uSD-MISO  [PAD-JUMPER-3-3OF3_NC_BY_TRACE_YES_SILK_FULL_BOX]  89.66,224.92 90 bottom
SJ82  uSD-MOSI  [PAD-JUMPER-3-3OF3_NC_BY_TRACE_YES_SILK_FULL_BOX]  92.46,224.79 90 bottom
SJ83  uSD-SCK  [PAD-JUMPER-3-3OF3_NC_BY_TRACE_YES_SILK_FULL_BOX]  86.74,224.79 90 bottom
SJ84  CS  [PAD-JUMPER-2-NC_BY_TRACE_YES_SILK]  94.74,226.06 90 bottom
SJ85  PWR-LED  [PAD-JUMPER-2-NC_BY_TRACE_YES_SILK]  71.5,227.33 0 bottom
SJ86  GPS-LED  [PAD-JUMPER-2-NC_BY_TRACE_YES_SILK]  71.5,231.14 180 bottom
SJ87  [PAD-JUMPER-3-2OF3_NC_BY_PASTE_YES_SILK_FULL_BOX]  119.13,194.31 270 top
SJ88  VBAT-3.3V  [PAD-JUMPER-2-NO_YES_SILK]  69.09,193.04 270 top
U1  APK2112-3.3V  [SOT23-5]  28.45,21.59 0 top
U2  GP3906-TLP  [GP3906-TLP]  17.65,31.75 0 top
U3  TXB0108  [UFDFN-20]  30.35,49.53 270 top
U4  TXB0108  [UFDFN-20]  90.55,49.53 270 top
U5  GP3906-TLP  [GP3906-TLP]  77.85,31.75 0 top
U6  APK2112-3.3V  [SOT23-5]  88.65,21.59 0 top
U7  TXB0108  [UFDFN-20]  30.35,106.68 270 top
U8  GP3906-TLP  [GP3906-TLP]  17.65,88.9 0 top
U9  APK2112-3.3V  [SOT23-5]  28.45,78.74 0 top
U10  TXB0108  [UFDFN-20]  90.55,106.68 270 top
U11  GP3906-TLP  [GP3906-TLP]  77.85,88.9 0 top
U12  APK2112-3.3V  [SOT23-5]  88.65,78.74 0 top
U13  TXB0108  [UFDFN-20]  30.35,163.83 270 top
U14  GP3906-TLP  [GP3906-TLP]  17.65,146.05 0 top
U15  APK2112-3.3V  [SOT23-5]  28.45,135.89 0 top
U16  TXB0108  [UFDFN-20]  90.55,163.83 270 top
U17  GP3906-TLP  [GP3906-TLP]  77.85,146.05 0 top
U18  APK2112-3.3V  [SOT23-5]  88.65,135.89 0 top
U19  TXB0108  [UFDFN-20]  30.35,220.98 270 top
U20  GP3906-TLP  [GP3906-TLP]  17.65,203.2 0 top
U21  APK2112-3.3V  [SOT23-5]  28.45,193.04 0 top
U22  TXB0108  [UFDFN-20]  90.55,220.98 270 top
U23  GP3906-TLP  [GP3906-TLP]  77.85,203.2 0 top
U24  APK2112-3.3V  [SOT23-5]  88.65,193.04 0 top

## Library data of the parts
BAT1-BAT8 = SparkFun-Electromechanical; PROD_ID: BATT-08044
C1 C2 C7 C8 C11 C12 C15 C16 C19 C20 C23 C24 C27 C28 C31 C32 = SparkFun-Capacitors; PROD_ID: CAP-00868
C3-C6 C9 C10 C13 C14 C17 C18 C21 C22 C25 C26 C29 C30 = SparkFun-Capacitors; PROD_ID: CAP-00810
D1 D3 D5 D7 D9 D11 D13 D15 = SparkFun-LED; PROD_ID: DIO-00819
D2 D4 D6 D8 D10 D12 D14 D16 = SparkFun-LED; PROD_ID: DIO-08575
E$1 = SparkFun-Retired
E$4 E$5 JP19 JP20 JP22 JP23 JP42 JP43 JP62 JP63 JP82 JP83 JP102 JP103 JP122 JP123 JP142 JP143 LOGO1-LOGO16 = SparkFun-Aesthetics
J1 J3 J5 J7 J9 J11 J13 J15 = SparkFun-Boards
J2 J4 J6 J8 J10 J12 J14 J16 = SparkFun-Connectors; PROD_ID: CONN-07820
JP1 JP2 JP4 JP6-JP12 JP14 JP24 JP28-JP37 JP44 JP48-JP57 JP64 JP68-JP77 JP84 JP88-JP97 JP104 JP108-JP117 JP124 JP128-JP137 JP144 JP148-JP157 = SparkFun-Connectors; PROD_ID: CONN-11563
JP3 JP15-JP17 JP26 JP27 JP38 JP39 JP46 JP47 JP58 JP59 JP66 JP67 JP78 JP79 JP86 JP87 JP98 JP99 JP106 JP107 JP118 JP119 JP126 JP127 JP138 JP139 JP146 JP147 JP158 JP159 = SparkFun-Connectors
JP5 JP25 JP45 JP65 JP85 JP105 JP125 JP145 = SparkFun-Connectors; PROD_ID: CONN-08437
JP13 JP18 JP21 JP40 JP41 JP60 JP61 JP80 JP81 JP100 JP101 JP120 JP121 JP140 JP141 JP160 = SparkFun-Connectors; PROD_ID: CONN-08438
R1 R5 R9 R13 R17 R21 R25 R29 = SparkFun-Resistors; PROD_ID: RES-07856
R2 R3 R7 R8 R11 R12 R15 R16 R19 R20 R23 R24 R27 R28 R31 R32 = SparkFun-Resistors; PROD_ID: RES-07828
R4 R6 R10 R14 R18 R22 R26 R30 = SparkFun-Resistors; PROD_ID: RES-00818
S1 S4 S6 S8 S10 S12 S14 S16 = SparkFun-Electromechanical; PROD_ID: SWCH-08247
S2 S3 S5 S7 S9 S11 S13 S15 = SparkFun-Electromechanical; PROD_ID: SWCH-08179
SJ1-SJ88 = SparkFun-Passives
U1 U6 U9 U12 U15 U18 U21 U24 = SparkFun-PowerIC; PROD_ID: VREG-12457
U2 U5 U8 U11 U14 U17 U20 U23 = gps-shield-temp; PROD_ID: GPS-13174
U3 U4 U7 U10 U13 U16 U19 U22 = SparkFun-DigitalIC; PROD_ID: IC-12292

## Nets
3.3V: C2.1 C4.1 J2.VCC JP21.1 R2.2 R3.2 SJ1.1 SJ2.1 SJ3.1 SJ11.1 U1.5 U2.1 U3.5 U3.6
3.3V1: C6.1 C8.1 J4.VCC JP40.1 R7.2 R8.2 SJ14.1 SJ19.1 SJ21.1 SJ22.1 U4.5 U4.6 U5.1 U6.5
3.3V2: C10.1 C12.1 J6.VCC JP60.1 R11.2 R12.2 SJ25.1 SJ30.1 SJ32.1 SJ33.1 U7.5 U7.6 U8.1 U9.5
3.3V3: C14.1 C16.1 J8.VCC JP80.1 R15.2 R16.2 SJ36.1 SJ41.1 SJ43.1 SJ44.1 U10.5 U10.6 U11.1 U12.5
3.3V4: C18.1 C20.1 J10.VCC JP100.1 R19.2 R20.2 SJ47.1 SJ52.1 SJ54.1 SJ55.1 U13.5 U13.6 U14.1 U15.5
3.3V5: C22.1 C24.1 J12.VCC JP120.1 R23.2 R24.2 SJ58.1 SJ63.1 SJ65.1 SJ66.1 U16.5 U16.6 U17.1 U18.5
3.3V6: C26.1 C28.1 J14.VCC JP140.1 R27.2 R28.2 SJ69.1 SJ74.1 SJ76.1 SJ77.1 U19.5 U19.6 U20.1 U21.5
3.3V7: C30.1 C32.1 J16.VCC JP160.1 R31.2 R32.2 SJ80.1 SJ85.1 SJ87.1 SJ88.1 U22.5 U22.6 U23.1 U24.5
3.3VIN: J1.3.3V JP3.5
3.3VIN1: J3.3.3V JP38.5
3.3VIN2: J5.3.3V JP58.5
3.3VIN3: J7.3.3V JP78.5
3.3VIN4: J9.3.3V JP98.5
3.3VIN5: J11.3.3V JP118.5
3.3VIN6: J13.3.3V JP138.5
3.3VIN7: J15.3.3V JP158.5
5V: C1.1 J1.5V JP3.4 SJ1.3 SJ3.3 U1.1 U1.3
5V1: C7.1 J3.5V JP38.4 SJ14.3 SJ21.3 U6.1 U6.3
5V2: C11.1 J5.5V JP58.4 SJ25.3 SJ32.3 U9.1 U9.3
5V3: C15.1 J7.5V JP78.4 SJ36.3 SJ43.3 U12.1 U12.3
5V4: C19.1 J9.5V JP98.4 SJ47.3 SJ54.3 U15.1 U15.3
5V5: C23.1 J11.5V JP118.4 SJ58.3 SJ65.3 U18.1 U18.3
5V6: C27.1 J13.5V JP138.4 SJ69.3 SJ76.3 U21.1 U21.3
5V7: C31.1 J15.5V JP158.4 SJ80.3 SJ87.3 U24.1 U24.3
!RESET!: J1.RES J1.RST_ICSP JP3.6 S1.3
!RESET!1: J3.RES J3.RST_ICSP JP38.6 S4.3
!RESET!2: J5.RES J5.RST_ICSP JP58.6 S6.3
!RESET!3: J7.RES J7.RST_ICSP JP78.6 S8.3
!RESET!4: J9.RES J9.RST_ICSP JP98.6 S10.3
!RESET!5: J11.RES J11.RST_ICSP JP118.6 S12.3
!RESET!6: J13.RES J13.RST_ICSP JP138.6 S14.3
!RESET!7: J15.RES J15.RST_ICSP JP158.6 S16.3
!SD_CS!: J2.CS U3.4
!SD_CS!1: J4.CS U4.4
!SD_CS!2: J6.CS U7.4
!SD_CS!3: J8.CS U10.4
!SD_CS!4: J10.CS U13.4
!SD_CS!5: J12.CS U16.4
!SD_CS!6: J14.CS U19.4
!SD_CS!7: J16.CS U22.4
CD: J2.CD1 JP16.1
CD1: J4.CD1 JP39.1
CD2: J6.CD1 JP59.1
CD3: J8.CD1 JP79.1
CD4: J10.CD1 JP99.1
CD5: J12.CD1 JP119.1
CD6: J14.CD1 JP139.1
CD7: J16.CD1 JP159.1
D1: J3.D10 JP24.3 SJ18.2
D2: J3.D11 JP24.4 SJ16.3
D3: J3.D12 JP24.5 SJ15.3
D4: J3.D13 JP24.6 SJ17.3
D5: J5.D10 JP44.3 SJ29.2
D6: J5.D11 JP44.4 SJ27.3
D7: J5.D12 JP44.5 SJ26.3
D8: J5.D13 JP44.6 SJ28.3
D8_SW_RX: J1.D8 JP14.1 SJ4.1
D8_SW_RX1: J3.D8 JP24.1 SJ12.1
D8_SW_RX2: J5.D8 JP44.1 SJ23.1
D8_SW_RX3: J7.D8 JP64.1 SJ34.1
D8_SW_RX4: J9.D8 JP84.1 SJ45.1
D8_SW_RX5: J11.D8 JP104.1 SJ56.1
D8_SW_RX6: J13.D8 JP124.1 SJ67.1
D8_SW_RX7: J15.D8 JP144.1 SJ78.1
D9: J7.D10 JP64.3 SJ40.2
D9_SW_TX: J1.D9 JP14.2 SJ5.1
D9_SW_TX1: J3.D9 JP24.2 SJ13.1
D9_SW_TX2: J5.D9 JP44.2 SJ24.1
D9_SW_TX3: J7.D9 JP64.2 SJ35.1
D9_SW_TX4: J9.D9 JP84.2 SJ46.1
D9_SW_TX5: J11.D9 JP104.2 SJ57.1
D9_SW_TX6: J13.D9 JP124.2 SJ68.1
D9_SW_TX7: J15.D9 JP144.2 SJ79.1
D10: J1.D10 JP14.3 SJ6.2
D11: J1.D11 JP14.4 SJ10.3
D12: J1.D12 JP14.5 SJ8.3
D13: J1.D13 JP14.6 SJ7.3
D14: J7.D11 JP64.4 SJ38.3
D15: J7.D12 JP64.5 SJ37.3
D16: J7.D13 JP64.6 SJ39.3
D17: J9.D10 JP84.3 SJ51.2
D18: J9.D11 JP84.4 SJ49.3
D19: J9.D12 JP84.5 SJ48.3
D20: J9.D13 JP84.6 SJ50.3
D21: J11.D10 JP104.3 SJ62.2
D22: J11.D11 JP104.4 SJ60.3
D23: J11.D12 JP104.5 SJ59.3
D24: J11.D13 JP104.6 SJ61.3
D25: J13.D10 JP124.3 SJ73.2
D26: J13.D11 JP124.4 SJ71.3
D27: J13.D12 JP124.5 SJ70.3
D28: J13.D13 JP124.6 SJ72.3
D29: J15.D10 JP144.3 SJ84.2
D30: J15.D11 JP144.4 SJ82.3
D31: J15.D12 JP144.5 SJ81.3
D32: J15.D13 JP144.6 SJ83.3
GND: BAT1.GND C1.2 C2.2 C3.2 C4.2 D1.C J1.GND@0 J1.GND@1 J1.GND@2 J1.GND_ICSP J2.GND J2.GND1 J2.GND3 JP3.2 JP3.3 JP10.1 JP10.2 JP10.3 JP10.4 JP10.5 JP10.6 JP10.7 JP10.8 JP10.9 JP10.10 JP14.7 JP21.8 R4.1 S1.1 U1.2 U2.3 U2.8 U2.11 U2.20 U3.15
GND1: BAT2.GND C5.2 C6.2 C7.2 C8.2 D3.C J3.GND@0 J3.GND@1 J3.GND@2 J3.GND_ICSP J4.GND J4.GND1 J4.GND3 JP24.7 JP33.1 JP33.2 JP33.3 JP33.4 JP33.5 JP33.6 JP33.7 JP33.8 JP33.9 JP33.10 JP38.2 JP38.3 JP40.8 R6.1 S4.1 U4.15 U5.3 U5.8 U5.11 U5.20 U6.2
GND2: BAT3.GND C9.2 C10.2 C11.2 C12.2 D5.C J5.GND@0 J5.GND@1 J5.GND@2 J5.GND_ICSP J6.GND J6.GND1 J6.GND3 JP44.7 JP53.1 JP53.2 JP53.3 JP53.4 JP53.5 JP53.6 JP53.7 JP53.8 JP53.9 JP53.10 JP58.2 JP58.3 JP60.8 R10.1 S6.1 U7.15 U8.3 U8.8 U8.11 U8.20 U9.2
GND3: BAT4.GND C13.2 C14.2 C15.2 C16.2 D7.C J7.GND@0 J7.GND@1 J7.GND@2 J7.GND_ICSP J8.GND J8.GND1 J8.GND3 JP64.7 JP73.1 JP73.2 JP73.3 JP73.4 JP73.5 JP73.6 JP73.7 JP73.8 JP73.9 JP73.10 JP78.2 JP78.3 JP80.8 R14.1 S8.1 U10.15 U11.3 U11.8 U11.11 U11.20 U12.2
GND4: BAT5.GND C17.2 C18.2 C19.2 C20.2 D9.C J9.GND@0 J9.GND@1 J9.GND@2 J9.GND_ICSP J10.GND J10.GND1 J10.GND3 JP84.7 JP93.1 JP93.2 JP93.3 JP93.4 JP93.5 JP93.6 JP93.7 JP93.8 JP93.9 JP93.10 JP98.2 JP98.3 JP100.8 R18.1 S10.1 U13.15 U14.3 U14.8 U14.11 U14.20 U15.2
GND5: BAT6.GND C21.2 C22.2 C23.2 C24.2 D11.C J11.GND@0 J11.GND@1 J11.GND@2 J11.GND_ICSP J12.GND J12.GND1 J12.GND3 JP104.7 JP113.1 JP113.2 JP113.3 JP113.4 JP113.5 JP113.6 JP113.7 JP113.8 JP113.9 JP113.10 JP118.2 JP118.3 JP120.8 R22.1 S12.1 U16.15 U17.3 U17.8 U17.11 U17.20 U18.2
GND6: BAT7.GND C25.2 C26.2 C27.2 C28.2 D13.C J13.GND@0 J13.GND@1 J13.GND@2 J13.GND_ICSP J14.GND J14.GND1 J14.GND3 JP124.7 JP133.1 JP133.2 JP133.3 JP133.4 JP133.5 JP133.6 JP133.7 JP133.8 JP133.9 JP133.10 JP138.2 JP138.3 JP140.8 R26.1 S14.1 U19.15 U20.3 U20.8 U20.11 U20.20 U21.2
GND7: BAT8.GND C29.2 C30.2 C31.2 C32.2 D15.C J15.GND@0 J15.GND@1 J15.GND@2 J15.GND_ICSP J16.GND J16.GND1 J16.GND3 JP144.7 JP153.1 JP153.2 JP153.3 JP153.4 JP153.5 JP153.6 JP153.7 JP153.8 JP153.9 JP153.10 JP158.2 JP158.3 JP160.8 R30.1 S16.1 U22.15 U23.3 U23.8 U23.11 U23.20 U24.2
GPS_FIX: JP21.3 SJ9.2 U2.5
GPS_FIX1: JP40.3 SJ20.2 U5.5
GPS_FIX2: JP60.3 SJ31.2 U8.5
GPS_FIX3: JP80.3 SJ42.2 U11.5
GPS_FIX4: JP100.3 SJ53.2 U14.5
GPS_FIX5: JP120.3 SJ64.2 U17.5
GPS_FIX6: JP140.3 SJ75.2 U20.5
GPS_FIX7: JP160.3 SJ86.2 U23.5
GPS_RST: JP21.6 U2.13
GPS_RST1: JP40.6 U5.13
GPS_RST2: JP60.6 U8.13
GPS_RST3: JP80.6 U11.13
GPS_RST4: JP100.6 U14.13
GPS_RST5: JP120.6 U17.13
GPS_RST6: JP140.6 U20.13
GPS_RST7: JP160.6 U23.13
GPS_RX: JP21.5 U2.10 U3.9
GPS_RX1: JP40.5 U4.9 U5.10
GPS_RX2: JP60.5 U7.9 U8.10
GPS_RX3: JP80.5 U10.9 U11.10
GPS_RX4: JP100.5 U13.9 U14.10
GPS_RX5: JP120.5 U16.9 U17.10
GPS_RX6: JP140.5 U19.9 U20.10
GPS_RX7: JP160.5 U22.9 U23.10
GPS_TX: JP21.4 U2.9 U3.10
GPS_TX1: JP40.4 U4.10 U5.9
GPS_TX2: JP60.4 U7.10 U8.9
GPS_TX3: JP80.4 U10.10 U11.9
GPS_TX4: JP100.4 U13.10 U14.9
GPS_TX5: JP120.4 U16.10 U17.9
GPS_TX6: JP140.4 U19.10 U20.9
GPS_TX7: JP160.4 U22.10 U23.9
HV_CS: JP17.1 SJ6.1 U3.17
HV_CS1: JP27.1 SJ18.1 U4.17
HV_CS2: JP47.1 SJ29.1 U7.17
HV_CS3: JP67.1 SJ40.1 U10.17
HV_CS4: JP87.1 SJ51.1 U13.17
HV_CS5: JP107.1 SJ62.1 U16.17
HV_CS6: JP127.1 SJ73.1 U19.17
HV_CS7: JP147.1 SJ84.1 U22.17
HV_MISO: SJ8.2 U3.20
HV_MISO1: SJ15.2 U4.20
HV_MISO2: SJ26.2 U7.20
HV_MISO3: SJ37.2 U10.20
HV_MISO4: SJ48.2 U13.20
HV_MISO5: SJ59.2 U16.20
HV_MISO6: SJ70.2 U19.20
HV_MISO7: SJ81.2 U22.20
HV_MOSI: SJ10.2 U3.18
HV_MOSI1: SJ16.2 U4.18
HV_MOSI2: SJ27.2 U7.18
HV_MOSI3: SJ38.2 U10.18
HV_MOSI4: SJ49.2 U13.18
HV_MOSI5: SJ60.2 U16.18
HV_MOSI6: SJ71.2 U19.18
HV_MOSI7: SJ82.2 U22.18
HV_SCK: SJ7.2 U3.19
HV_SCK1: SJ17.2 U4.19
HV_SCK2: SJ28.2 U7.19
HV_SCK3: SJ39.2 U10.19
HV_SCK4: SJ50.2 U13.19
HV_SCK5: SJ61.2 U16.19
HV_SCK6: SJ72.2 U19.19
HV_SCK7: SJ83.2 U22.19
HW_RX: J1.RX JP13.1 S2.1
HW_RX1: J3.RX JP18.1 S3.1
HW_RX2: J5.RX JP41.1 S5.1
HW_RX3: J7.RX JP61.1 S7.1
HW_RX4: J9.RX JP81.1 S9.1
HW_RX5: J11.RX JP101.1 S11.1
HW_RX6: J13.RX JP121.1 S13.1
HW_RX7: J15.RX JP141.1 S15.1
HW_TX: J1.TX JP13.2 S2.4
HW_TX1: J3.TX JP18.2 S3.4
HW_TX2: J5.TX JP41.2 S5.4
HW_TX3: J7.TX JP61.2 S7.4
HW_TX4: J9.TX JP81.2 S9.4
HW_TX5: J11.TX JP101.2 S11.4
HW_TX6: J13.TX JP121.2 S13.4
HW_TX7: J15.TX JP141.2 S15.4
ICSP_MISO: J1.MISO SJ8.1
ICSP_MISO1: J3.MISO SJ15.1
ICSP_MISO2: J5.MISO SJ26.1
ICSP_MISO3: J7.MISO SJ37.1
ICSP_MISO4: J9.MISO SJ48.1
ICSP_MISO5: J11.MISO SJ59.1
ICSP_MISO6: J13.MISO SJ70.1
ICSP_MISO7: J15.MISO SJ81.1
ICSP_MOSI: J1.MOSI SJ10.1
ICSP_MOSI1: J3.MOSI SJ16.1
ICSP_MOSI2: J5.MOSI SJ27.1
ICSP_MOSI3: J7.MOSI SJ38.1
ICSP_MOSI4: J9.MOSI SJ49.1
ICSP_MOSI5: J11.MOSI SJ60.1
ICSP_MOSI6: J13.MOSI SJ71.1
ICSP_MOSI7: J15.MOSI SJ82.1
ICSP_SCK: J1.SCK SJ7.1
ICSP_SCK1: J3.SCK SJ17.1
ICSP_SCK2: J5.SCK SJ28.1
ICSP_SCK3: J7.SCK SJ39.1
ICSP_SCK4: J9.SCK SJ50.1
ICSP_SCK5: J11.SCK SJ61.1
ICSP_SCK6: J13.SCK SJ72.1
ICSP_SCK7: J15.SCK SJ83.1
IOREF: C3.1 J1.IOREF JP3.7 SJ3.2 U3.16
IOREF1: C5.1 J3.IOREF JP38.7 SJ14.2 U4.16
IOREF2: C9.1 J5.IOREF JP58.7 SJ25.2 U7.16
IOREF3: C13.1 J7.IOREF JP78.7 SJ36.2 U10.16
IOREF4: C17.1 J9.IOREF JP98.7 SJ47.2 U13.16
IOREF5: C21.1 J11.IOREF JP118.7 SJ58.2 U16.16
IOREF6: C25.1 J13.IOREF JP138.7 SJ69.2 U19.16
IOREF7: C29.1 J15.IOREF JP158.7 SJ80.2 U22.16
N$1: D1.A R1.1
N$2: D2.C R4.2
N$3: J1.A5 JP5.1
N$4: J1.A4 JP5.2
N$5: J1.D2 JP13.3
N$6: J1.D3 JP13.4
N$7: J1.D4 JP13.5
N$8: J1.D5 JP13.6
N$9: J1.D6 JP13.7
N$10: J1.D7 JP13.8
N$11: J1.A3 JP5.3
N$12: J1.A2 JP5.4
N$13: J1.A1 JP5.5
N$14: J1.A0 JP5.6
N$15: R1.2 SJ2.2
N$16: JP1.1 JP1.2 JP1.3 JP1.4 JP1.5 JP1.6 JP1.7 JP1.8 JP1.9 JP1.10 SJ1.2
N$17: D2.A SJ9.1
N$18: J2.RSV1 R2.1
N$19: J2.RSV2 R3.1
N$20: J1.AREF JP14.8
N$21: J1.SDA JP14.9
N$22: J1.SCL JP14.10
N$23: D3.A R5.1
N$24: J1.VIN JP3.1
N$25: JP26.2 S3.6 SJ13.2
N$26: JP26.1 S3.3 SJ12.2
N$27: J3.D2 JP18.3
N$28: J3.D3 JP18.4
N$29: J3.D4 JP18.5
N$30: J3.D5 JP18.6
N$31: J3.D6 JP18.7
N$32: J3.D7 JP18.8
N$33: J3.AREF JP24.8
N$34: J3.SDA JP24.9
N$35: J3.SCL JP24.10
N$36: J3.VIN JP38.1
N$37: J3.A5 JP25.1
N$38: J3.A4 JP25.2
N$39: J3.A3 JP25.3
N$40: J3.A2 JP25.4
N$41: J3.A1 JP25.5
N$42: J3.A0 JP25.6
N$43: R5.2 SJ19.2
N$44: D4.C R6.2
N$45: D4.A SJ20.1
N$46: JP36.1 JP36.2 JP36.3 JP36.4 JP36.5 JP36.6 JP36.7 JP36.8 JP36.9 JP36.10 SJ21.2
N$47: J4.RSV1 R7.1
N$48: J4.RSV2 R8.1
N$49: D5.A R9.1
N$50: JP46.2 S5.6 SJ24.2
N$51: JP46.1 S5.3 SJ23.2
N$52: J5.D2 JP41.3
N$53: J5.D3 JP41.4
N$54: J5.D4 JP41.5
N$55: J5.D5 JP41.6
N$56: J5.D6 JP41.7
N$57: J5.D7 JP41.8
N$58: J5.AREF JP44.8
N$59: J5.SDA JP44.9
N$60: J5.SCL JP44.10
N$61: J5.VIN JP58.1
N$62: J5.A5 JP45.1
N$63: J5.A4 JP45.2
N$64: J5.A3 JP45.3
N$65: J5.A2 JP45.4
N$66: J5.A1 JP45.5
N$67: J5.A0 JP45.6
N$68: R9.2 SJ30.2
N$69: D6.C R10.2
N$70: D6.A SJ31.1
N$71: JP56.1 JP56.2 JP56.3 JP56.4 JP56.5 JP56.6 JP56.7 JP56.8 JP56.9 JP56.10 SJ32.2
N$72: J6.RSV1 R11.1
N$73: J6.RSV2 R12.1
N$74: D7.A R13.1
N$75: JP66.2 S7.6 SJ35.2
N$76: JP66.1 S7.3 SJ34.2
N$77: J7.D2 JP61.3
N$78: J7.D3 JP61.4
N$79: J7.D4 JP61.5
N$80: J7.D5 JP61.6
N$81: J7.D6 JP61.7
N$82: J7.D7 JP61.8
N$83: J7.AREF JP64.8
N$84: J7.SDA JP64.9
N$85: J7.SCL JP64.10
N$86: J7.VIN JP78.1
N$87: J7.A5 JP65.1
N$88: J7.A4 JP65.2
N$89: J7.A3 JP65.3
N$90: J7.A2 JP65.4
N$91: J7.A1 JP65.5
N$92: J7.A0 JP65.6
N$93: R13.2 SJ41.2
N$94: D8.C R14.2
N$95: D8.A SJ42.1
N$96: JP76.1 JP76.2 JP76.3 JP76.4 JP76.5 JP76.6 JP76.7 JP76.8 JP76.9 JP76.10 SJ43.2
N$97: J8.RSV1 R15.1
N$98: J8.RSV2 R16.1
N$99: D9.A R17.1
N$100: JP86.2 S9.6 SJ46.2
N$101: JP86.1 S9.3 SJ45.2
N$102: J9.D2 JP81.3
N$103: J9.D3 JP81.4
N$104: J9.D4 JP81.5
N$105: J9.D5 JP81.6
N$106: J9.D6 JP81.7
N$107: J9.D7 JP81.8
N$108: J9.AREF JP84.8
N$109: J9.SDA JP84.9
N$110: J9.SCL JP84.10
N$111: J9.VIN JP98.1
N$112: J9.A5 JP85.1
N$113: J9.A4 JP85.2
N$114: J9.A3 JP85.3
N$115: J9.A2 JP85.4
N$116: J9.A1 JP85.5
N$117: J9.A0 JP85.6
N$118: R17.2 SJ52.2
N$119: D10.C R18.2
N$120: D10.A SJ53.1
N$121: JP15.2 S2.6 SJ5.2
N$122: JP15.1 S2.3 SJ4.2
N$123: JP96.1 JP96.2 JP96.3 JP96.4 JP96.5 JP96.6 JP96.7 JP96.8 JP96.9 JP96.10 SJ54.2
N$124: J10.RSV1 R19.1
N$125: J10.RSV2 R20.1
N$126: D11.A R21.1
N$127: JP106.2 S11.6 SJ57.2
N$128: JP106.1 S11.3 SJ56.2
N$129: J11.D2 JP101.3
N$130: J11.D3 JP101.4
N$131: J11.D4 JP101.5
N$132: J11.D5 JP101.6
N$133: J11.D6 JP101.7
N$134: J11.D7 JP101.8
N$135: J11.AREF JP104.8
N$136: J11.SDA JP104.9
N$137: J11.SCL JP104.10
N$138: J11.VIN JP118.1
N$139: J11.A5 JP105.1
N$140: J11.A4 JP105.2
N$141: J11.A3 JP105.3
N$142: J11.A2 JP105.4
N$143: J11.A1 JP105.5
N$144: J11.A0 JP105.6
N$145: R21.2 SJ63.2
N$146: D12.C R22.2
N$147: D12.A SJ64.1
N$148: JP116.1 JP116.2 JP116.3 JP116.4 JP116.5 JP116.6 JP116.7 JP116.8 JP116.9 JP116.10 SJ65.2
N$149: J12.RSV1 R23.1
N$150: J12.RSV2 R24.1
N$151: D13.A R25.1
N$152: JP126.2 S13.6 SJ68.2
N$153: JP126.1 S13.3 SJ67.2
N$154: J13.D2 JP121.3
N$155: J13.D3 JP121.4
N$156: J13.D4 JP121.5
N$157: J13.D5 JP121.6
N$158: J13.D6 JP121.7
N$159: J13.D7 JP121.8
N$160: J13.AREF JP124.8
N$161: J13.SDA JP124.9
N$162: J13.SCL JP124.10
N$163: J13.VIN JP138.1
N$164: J13.A5 JP125.1
N$165: J13.A4 JP125.2
N$166: J13.A3 JP125.3
N$167: J13.A2 JP125.4
N$168: J13.A1 JP125.5
N$169: J13.A0 JP125.6
N$170: R25.2 SJ74.2
N$171: D14.C R26.2
N$172: D14.A SJ75.1
N$173: JP136.1 JP136.2 JP136.3 JP136.4 JP136.5 JP136.6 JP136.7 JP136.8 JP136.9 JP136.10 SJ76.2
N$174: J14.RSV1 R27.1
N$175: J14.RSV2 R28.1
N$176: D15.A R29.1
N$177: JP146.2 S15.6 SJ79.2
N$178: JP146.1 S15.3 SJ78.2
N$179: J15.D2 JP141.3
N$180: J15.D3 JP141.4
N$181: J15.D4 JP141.5
N$182: J15.D5 JP141.6
N$183: J15.D6 JP141.7
N$184: J15.D7 JP141.8
N$185: J15.AREF JP144.8
N$186: J15.SDA JP144.9
N$187: J15.SCL JP144.10
N$188: J15.VIN JP158.1
N$189: J15.A5 JP145.1
N$190: J15.A4 JP145.2
N$191: J15.A3 JP145.3
N$192: J15.A2 JP145.4
N$193: J15.A1 JP145.5
N$194: J15.A0 JP145.6
N$195: R29.2 SJ85.2
N$196: D16.C R30.2
N$197: D16.A SJ86.1
N$198: JP156.1 JP156.2 JP156.3 JP156.4 JP156.5 JP156.6 JP156.7 JP156.8 JP156.9 JP156.10 SJ87.2
N$199: J16.RSV1 R31.1
N$200: J16.RSV2 R32.1
PPS: JP21.7 U2.12
PPS1: JP40.7 U5.12
PPS2: JP60.7 U8.12
PPS3: JP80.7 U11.12
PPS4: JP100.7 U14.12
PPS5: JP120.7 U17.12
PPS6: JP140.7 U20.12
PPS7: JP160.7 U23.12
RX: S2.5 U3.12
RX1: S3.5 U4.12
RX2: S5.5 U7.12
RX3: S7.5 U10.12
RX4: S9.5 U13.12
RX5: S11.5 U16.12
RX6: S13.5 U19.12
RX7: S15.5 U22.12
SD_MISO: J2.DO U3.1
SD_MISO1: J4.DO U4.1
SD_MISO2: J6.DO U7.1
SD_MISO3: J8.DO U10.1
SD_MISO4: J10.DO U13.1
SD_MISO5: J12.DO U16.1
SD_MISO6: J14.DO U19.1
SD_MISO7: J16.DO U22.1
SD_MOSI: J2.DI U3.3
SD_MOSI1: J4.DI U4.3
SD_MOSI2: J6.DI U7.3
SD_MOSI3: J8.DI U10.3
SD_MOSI4: J10.DI U13.3
SD_MOSI5: J12.DI U16.3
SD_MOSI6: J14.DI U19.3
SD_MOSI7: J16.DI U22.3
SD_SCK: J2.SCLK U3.2
SD_SCK1: J4.SCLK U4.2
SD_SCK2: J6.SCLK U7.2
SD_SCK3: J8.SCLK U10.2
SD_SCK4: J10.SCLK U13.2
SD_SCK5: J12.SCLK U16.2
SD_SCK6: J14.SCLK U19.2
SD_SCK7: J16.SCLK U22.2
TX: S2.2 U3.11
TX1: S3.2 U4.11
TX2: S5.2 U7.11
TX3: S7.2 U10.11
TX4: S9.2 U13.11
TX5: S11.2 U16.11
TX6: S13.2 U19.11
TX7: S15.2 U22.11
V_BATT: BAT1.PWR@1 JP21.2 SJ11.2 U2.4
V_BATT1: BAT2.PWR@1 JP40.2 SJ22.2 U5.4
V_BATT2: BAT3.PWR@1 JP60.2 SJ33.2 U8.4
V_BATT3: BAT4.PWR@1 JP80.2 SJ44.2 U11.4
V_BATT4: BAT5.PWR@1 JP100.2 SJ55.2 U14.4
V_BATT5: BAT6.PWR@1 JP120.2 SJ66.2 U17.4
V_BATT6: BAT7.PWR@1 JP140.2 SJ77.2 U20.4
V_BATT7: BAT8.PWR@1 JP160.2 SJ88.2 U23.4

## Tracks (layer width: path | path; a pad name or v marks a point on that pad's centre or on a via)
3.3V  (via drill 0.51)
  Top 0.203: U3.6 28.19,49.33 | U3.5 28.27,49.73 28.19,49.66 28.19,49.33 | 28.19,49.33 27.97,49.11 C4.1 26.39,49.11 26.29,49.01 v24.85,49.01 24.85,46.14 26.12,44.87 R3.2 R2.2
  Top 0.254: U1.5 27.08,22.89 26.63,22.44 C2.1 | C2.1 25.74,22.61 | v15.86,49.01 15.82,48.97 J2.VCC 10.2,48.97 v10.16,49.01 | C2.1 22.26,22.44 21.63,23.07 10.76,23.07 9.72,22.04 SJ11.1
  Top 0.305: SJ1.1 v60.83,23.67 | U2.1 27.5,25 | 27.5,25 U1.5 | 27.5,25 27.9,25.4 JP21.1
  Bottom 0.254: v15.86,49.01 v24.85,49.01 28.34,49.01 30.86,46.48 30.86,27.81 JP21.1 | v10.16,49.01 11.81,50.66 SJ2.1
  Bottom 0.305: v60.83,23.67 56.84,19.68 48.13,19.68 43.69,15.24 28.45,15.24 26.67,17.02 26.67,17.78 | 26.67,17.78 26.67,23.62 JP21.1 | SJ3.1 26.67,17.78
3.3V1  (via drill 0.51)
  Top 0.203: U4.6 88.39,49.33 | U4.5 88.47,49.73 88.39,49.66 88.39,49.33 | 88.39,49.33 88.17,49.11 C6.1 86.59,49.11 86.49,49.01 v85.05,49.01 85.05,46.14 86.32,44.87 R8.2 R7.2
  Top 0.254: U6.5 87.28,22.89 86.83,22.44 C8.1 | C8.1 85.94,22.61 | v76.06,49.01 76.02,48.97 J4.VCC 70.39,48.97 v70.36,49.01 | C8.1 82.46,22.44 81.83,23.07 70.95,23.07 69.92,22.04 SJ22.1
  Top 0.305: SJ21.1 v121.03,23.67 | U5.1 87.7,25 | 87.7,25 U6.5 | 87.7,25 88.1,25.4 JP40.1
  Bottom 0.254: v76.06,49.01 v85.05,49.01 88.53,49.01 91.06,46.48 91.06,27.81 JP40.1 | v70.36,49.01 72.01,50.66 SJ19.1
  Bottom 0.305: v121.03,23.67 117.04,19.68 108.33,19.68 103.89,15.24 88.65,15.24 86.87,17.02 86.87,17.78 | 86.87,17.78 86.87,23.62 JP40.1 | SJ14.1 86.87,17.78
3.3V2  (via drill 0.51)
  Top 0.203: U7.6 28.19,106.48 | U7.5 28.27,106.88 28.19,106.81 28.19,106.48 | 28.19,106.48 27.97,106.26 C10.1 26.39,106.26 26.29,106.16 v24.85,106.16 24.85,103.29 26.12,102.02 R12.2 R11.2
  Top 0.254: U9.5 27.08,80.04 26.63,79.59 C12.1 | C12.1 25.74,79.75 | v15.86,106.16 15.82,106.12 J6.VCC 10.2,106.12 v10.16,106.16 | C12.1 22.26,79.59 21.63,80.22 10.76,80.22 9.72,79.19 SJ33.1
  Top 0.305: SJ32.1 v60.83,80.82 | U8.1 27.5,82.15 | 27.5,82.15 U9.5 | 27.5,82.15 27.9,82.55 JP60.1
  Bottom 0.254: v15.86,106.16 v24.85,106.16 28.34,106.16 30.86,103.63 30.86,84.96 JP60.1 | v10.16,106.16 11.81,107.81 SJ30.1
  Bottom 0.305: v60.83,80.82 56.84,76.83 48.13,76.83 43.69,72.39 28.45,72.39 26.67,74.17 26.67,74.93 | 26.67,74.93 26.67,80.77 JP60.1 | SJ25.1 26.67,74.93
3.3V3  (via drill 0.51)
  Top 0.203: U10.6 88.39,106.48 | U10.5 88.47,106.88 88.39,106.81 88.39,106.48 | 88.39,106.48 88.17,106.26 C14.1 86.59,106.26 86.49,106.16 v85.05,106.16 85.05,103.29 86.32,102.02 R16.2 R15.2
  Top 0.254: U12.5 87.28,80.04 86.83,79.59 C16.1 | C16.1 85.94,79.75 | v76.06,106.16 76.02,106.12 J8.VCC 70.39,106.12 v70.36,106.16 | C16.1 82.46,79.59 81.83,80.22 70.95,80.22 69.92,79.19 SJ44.1
  Top 0.305: SJ43.1 v121.03,80.82 | U11.1 87.7,82.15 | 87.7,82.15 U12.5 | 87.7,82.15 88.1,82.55 JP80.1
  Bottom 0.254: v76.06,106.16 v85.05,106.16 88.53,106.16 91.06,103.63 91.06,84.96 JP80.1 | v70.36,106.16 72.01,107.81 SJ41.1
  Bottom 0.305: v121.03,80.82 117.04,76.83 108.33,76.83 103.89,72.39 88.65,72.39 86.87,74.17 86.87,74.93 | 86.87,74.93 86.87,80.77 JP80.1 | SJ36.1 86.87,74.93
3.3V4  (via drill 0.51)
  Top 0.203: U13.6 28.19,163.63 | U13.5 28.27,164.03 28.19,163.96 28.19,163.63 | 28.19,163.63 27.97,163.41 C18.1 26.39,163.41 26.29,163.31 v24.85,163.31 24.85,160.44 26.12,159.17 R20.2 R19.2
  Top 0.254: U15.5 27.08,137.19 26.63,136.74 C20.1 | C20.1 25.74,136.91 | v15.86,163.31 15.82,163.27 J10.VCC 10.2,163.27 v10.16,163.31 | C20.1 22.26,136.74 21.63,137.38 10.76,137.38 9.72,136.34 SJ55.1
  Top 0.305: SJ54.1 v60.83,137.97 | U14.1 27.5,139.3 | 27.5,139.3 U15.5 | 27.5,139.3 27.9,139.7 JP100.1
  Bottom 0.254: v15.86,163.31 v24.85,163.31 28.34,163.31 30.86,160.78 30.86,142.11 JP100.1 | v10.16,163.31 11.81,164.96 SJ52.1
  Bottom 0.305: v60.83,137.97 56.84,133.99 48.13,133.99 43.69,129.54 28.45,129.54 26.67,131.32 26.67,132.08 | 26.67,132.08 26.67,137.92 JP100.1 | SJ47.1 26.67,132.08
3.3V5  (via drill 0.51)
  Top 0.203: U16.6 88.39,163.63 | U16.5 88.47,164.03 88.39,163.96 88.39,163.63 | 88.39,163.63 88.17,163.41 C22.1 86.59,163.41 86.49,163.31 v85.05,163.31 85.05,160.44 86.32,159.17 R24.2 R23.2
  Top 0.254: U18.5 87.28,137.19 86.83,136.74 C24.1 | C24.1 85.94,136.91 | v76.06,163.31 76.02,163.27 J12.VCC 70.39,163.27 v70.36,163.31 | C24.1 82.46,136.74 81.83,137.38 70.95,137.38 69.92,136.34 SJ66.1
  Top 0.305: SJ65.1 v121.03,137.97 | U17.1 87.7,139.3 | 87.7,139.3 U18.5 | 87.7,139.3 88.1,139.7 JP120.1
  Bottom 0.254: v76.06,163.31 v85.05,163.31 88.53,163.31 91.06,160.78 91.06,142.11 JP120.1 | v70.36,163.31 72.01,164.96 SJ63.1
  Bottom 0.305: v121.03,137.97 117.04,133.99 108.33,133.99 103.89,129.54 88.65,129.54 86.87,131.32 86.87,132.08 | 86.87,132.08 86.87,137.92 JP120.1 | SJ58.1 86.87,132.08
3.3V6  (via drill 0.51)
  Top 0.203: U19.6 28.19,220.78 | U19.5 28.27,221.18 28.19,221.11 28.19,220.78 | 28.19,220.78 27.97,220.56 C26.1 26.39,220.56 26.29,220.46 v24.85,220.46 24.85,217.59 26.12,216.32 R28.2 R27.2
  Top 0.254: U21.5 27.08,194.34 26.63,193.89 C28.1 | C28.1 25.74,194.06 | v15.86,220.46 15.82,220.42 J14.VCC 10.2,220.42 v10.16,220.46 | C28.1 22.26,193.89 21.63,194.53 10.76,194.53 9.72,193.49 SJ77.1
  Top 0.305: SJ76.1 v60.83,195.12 | U20.1 27.5,196.45 | 27.5,196.45 U21.5 | 27.5,196.45 27.9,196.85 JP140.1
  Bottom 0.254: v15.86,220.46 v24.85,220.46 28.34,220.46 30.86,217.93 30.86,199.26 JP140.1 | v10.16,220.46 11.81,222.11 SJ74.1
  Bottom 0.305: v60.83,195.12 56.84,191.13 48.13,191.13 43.69,186.69 28.45,186.69 26.67,188.47 26.67,189.23 | 26.67,189.23 26.67,195.07 JP140.1 | SJ69.1 26.67,189.23
3.3V7  (via drill 0.51)
  Top 0.203: U22.6 88.39,220.78 | U22.5 88.47,221.18 88.39,221.11 88.39,220.78 | 88.39,220.78 88.17,220.56 C30.1 86.59,220.56 86.49,220.46 v85.05,220.46 85.05,217.59 86.32,216.32 R32.2 R31.2
  Top 0.254: U24.5 87.28,194.34 86.83,193.89 C32.1 | C32.1 85.94,194.06 | v76.06,220.46 76.02,220.42 J16.VCC 70.39,220.42 v70.36,220.46 | C32.1 82.46,193.89 81.83,194.53 70.95,194.53 69.92,193.49 SJ88.1
  Top 0.305: SJ87.1 v121.03,195.12 | U23.1 87.7,196.45 | 87.7,196.45 U24.5 | 87.7,196.45 88.1,196.85 JP160.1
  Bottom 0.254: v76.06,220.46 v85.05,220.46 88.53,220.46 91.06,217.93 91.06,199.26 JP160.1 | v70.36,220.46 72.01,222.11 SJ85.1
  Bottom 0.305: v121.03,195.12 117.04,191.13 108.33,191.13 103.89,186.69 88.65,186.69 86.87,188.47 86.87,189.23 | 86.87,189.23 86.87,195.07 JP160.1 | SJ80.1 86.87,189.23
3.3VIN
  Top 0.254: J1.3.3V JP3.5
3.3VIN1
  Top 0.254: J3.3.3V JP38.5
3.3VIN2
  Top 0.254: J5.3.3V JP58.5
3.3VIN3
  Top 0.254: J7.3.3V JP78.5
3.3VIN4
  Top 0.254: J9.3.3V JP98.5
3.3VIN5
  Top 0.254: J11.3.3V JP118.5
3.3VIN6
  Top 0.254: J13.3.3V JP138.5
3.3VIN7
  Top 0.254: J15.3.3V JP158.5
5V  (via drill 0.51)
  Top 0.254: J1.5V JP3.4
  Top 0.305: 36.07,20.74 C1.1 30.99,19.68 30.48,19.18 29.4,19.18 | 36.07,20.74 58.2,20.74 58.93,21.46 SJ1.3 | JP3.4 36.07,20.74 | 29.4,19.18 27.5,19.18 | 27.5,19.18 v23.82,19.18 | U1.1 27.5,19.18 | U1.3 29.4,19.18
  Bottom 0.305: SJ3.3 22.55,19 22.73,19.18 v23.82,19.18
5V1  (via drill 0.51)
  Top 0.254: J3.5V JP38.4
  Top 0.305: 96.27,20.74 C7.1 91.19,19.68 90.68,19.18 89.6,19.18 | 96.27,20.74 118.4,20.74 119.13,21.46 SJ21.3 | JP38.4 96.27,20.74 | 89.6,19.18 87.7,19.18 | 87.7,19.18 v84.02,19.18 | U6.1 87.7,19.18 | U6.3 89.6,19.18
  Bottom 0.305: SJ14.3 82.75,19 82.93,19.18 v84.02,19.18
5V2  (via drill 0.51)
  Top 0.254: J5.5V JP58.4
  Top 0.305: 36.07,77.89 C11.1 30.99,76.83 30.48,76.33 29.4,76.33 | 36.07,77.89 58.2,77.89 58.93,78.61 SJ32.3 | JP58.4 36.07,77.89 | 29.4,76.33 27.5,76.33 | 27.5,76.33 v23.82,76.33 | U9.1 27.5,76.33 | U9.3 29.4,76.33
  Bottom 0.305: SJ25.3 22.55,76.15 22.73,76.33 v23.82,76.33
5V3  (via drill 0.51)
  Top 0.254: J7.5V JP78.4